# Altium PCB Test_Monitor_PCB1.PcbDoc (part 1 of 3)
Units mm, origin at the board's own origin, x right, y up, seen from the top; angles counter-clockwise.
Board outline 100 x 83 mm, 4 copper layers (Top Layer, GND1, GND2, Bottom Layer), stack 1.57 mm thick; 215 components, 124 nets, 896 pads, 300 vias.
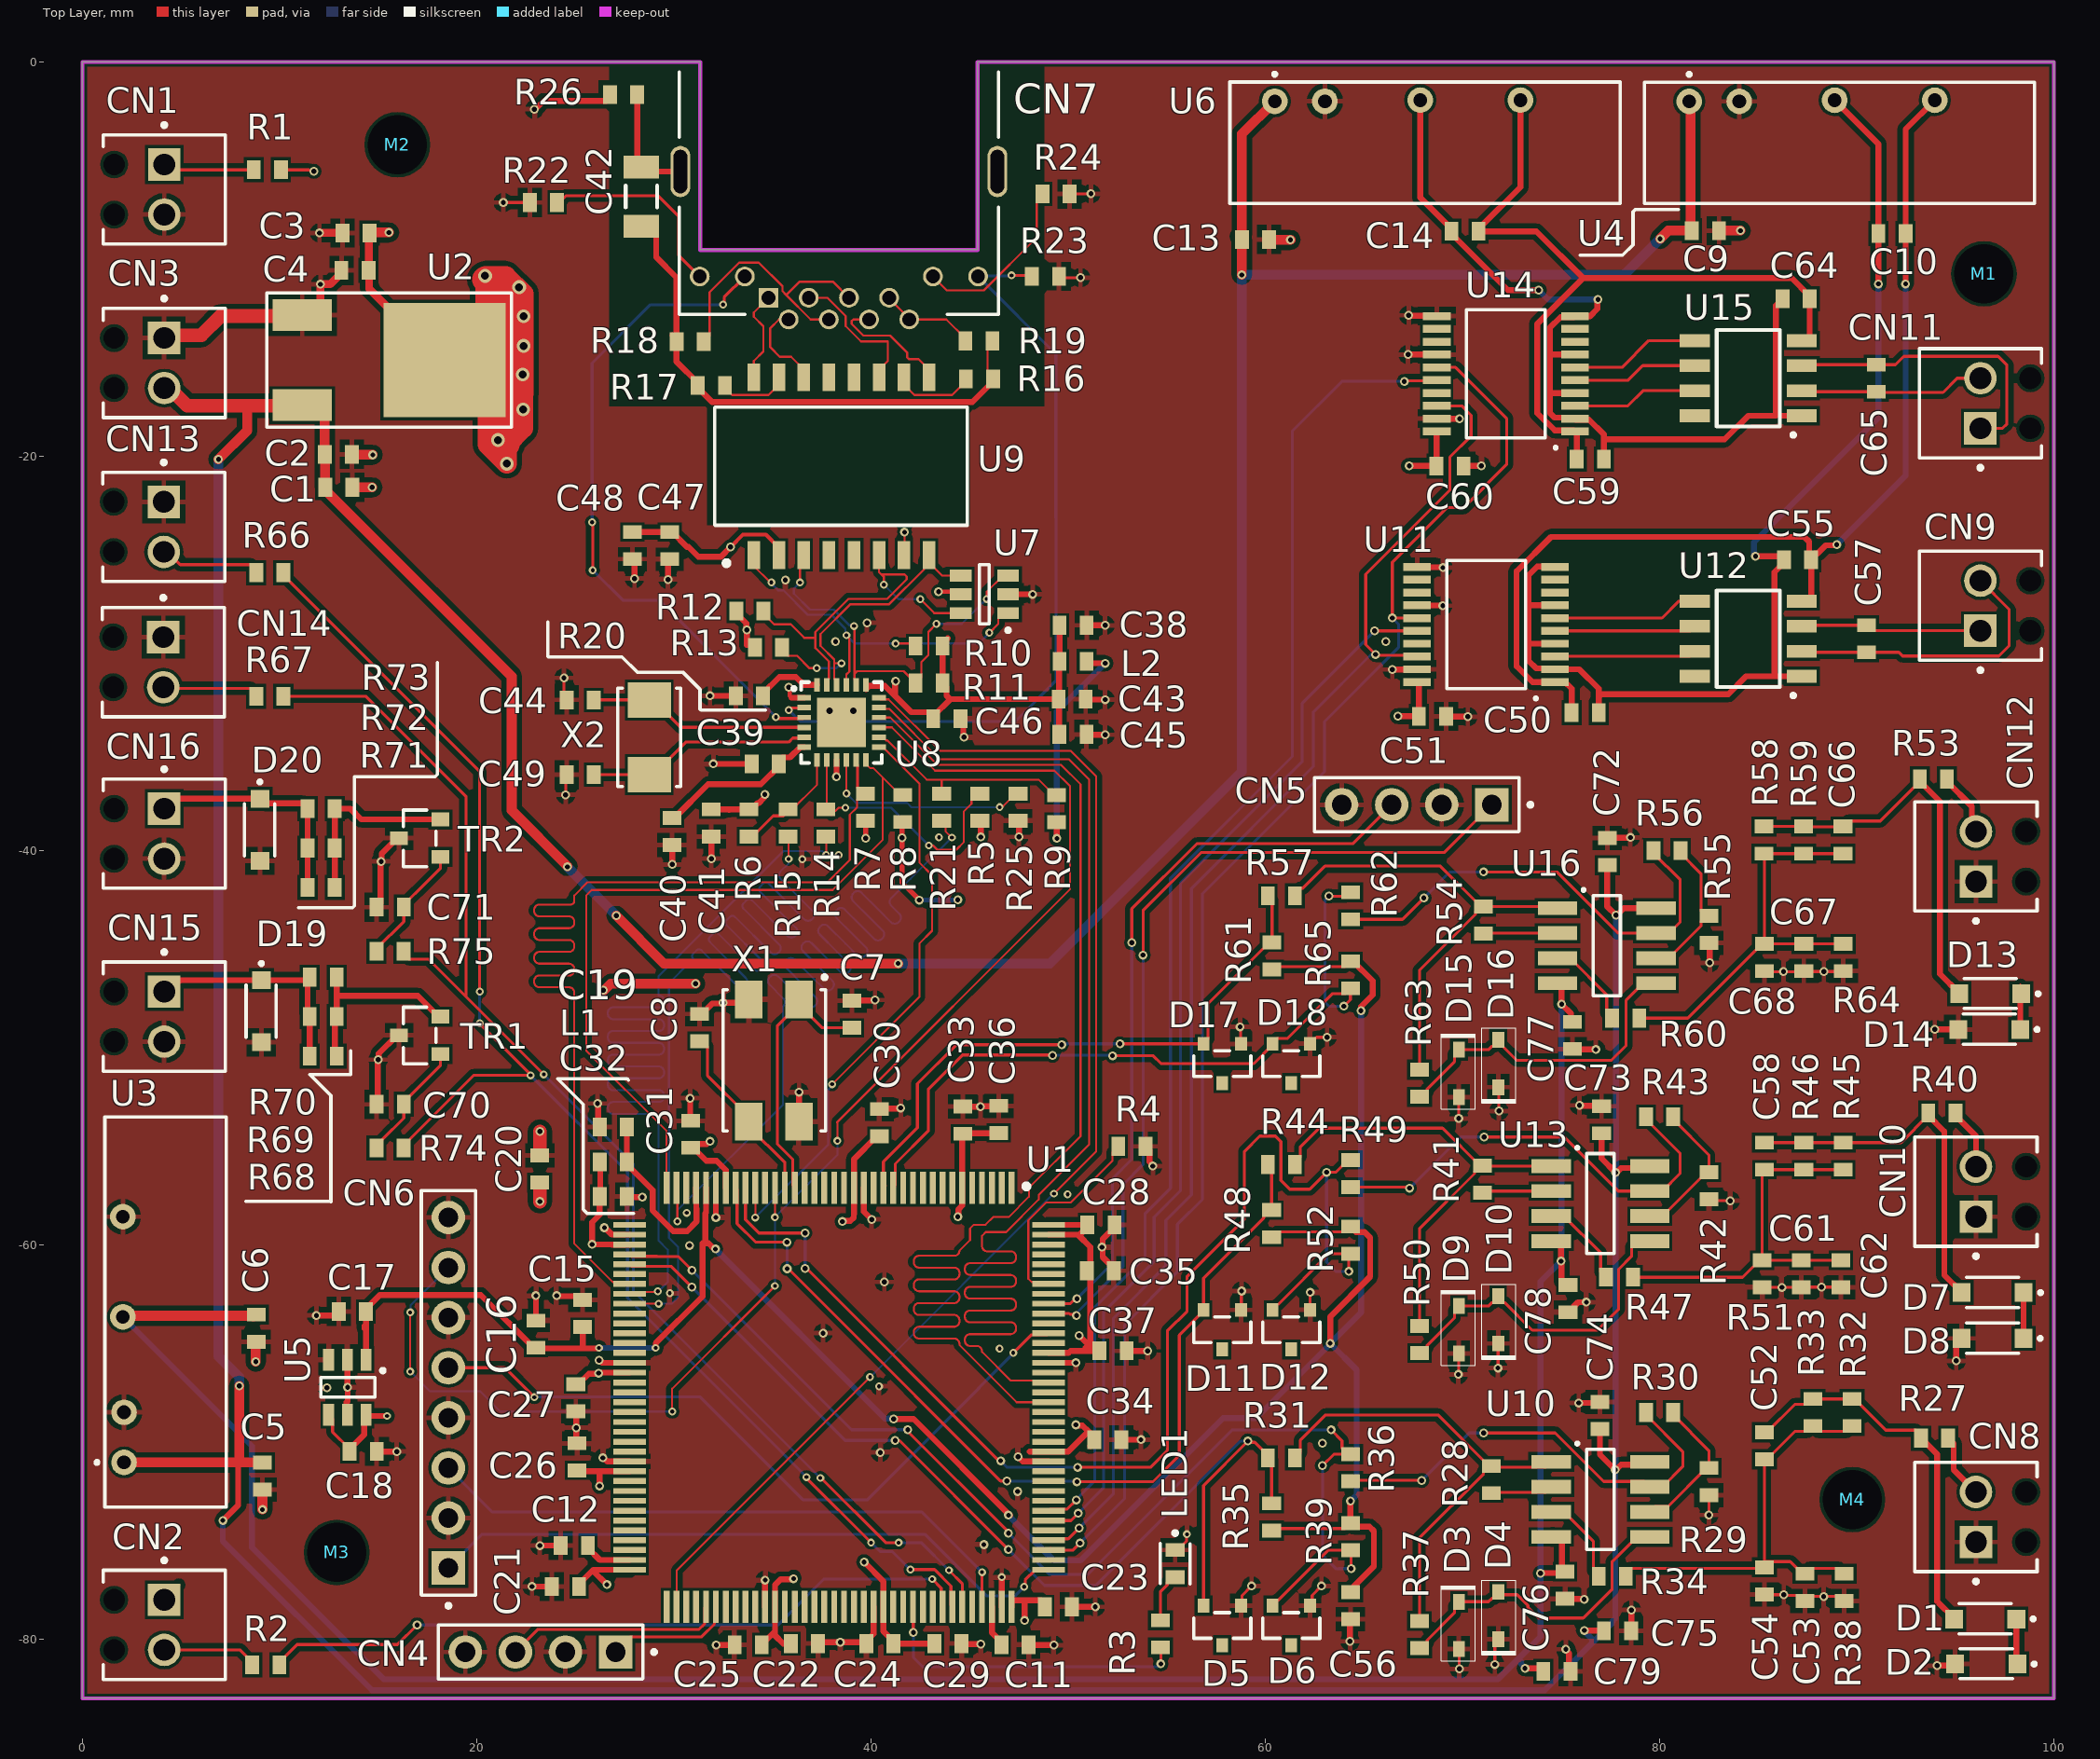
[diagram p0: Top Layer view]
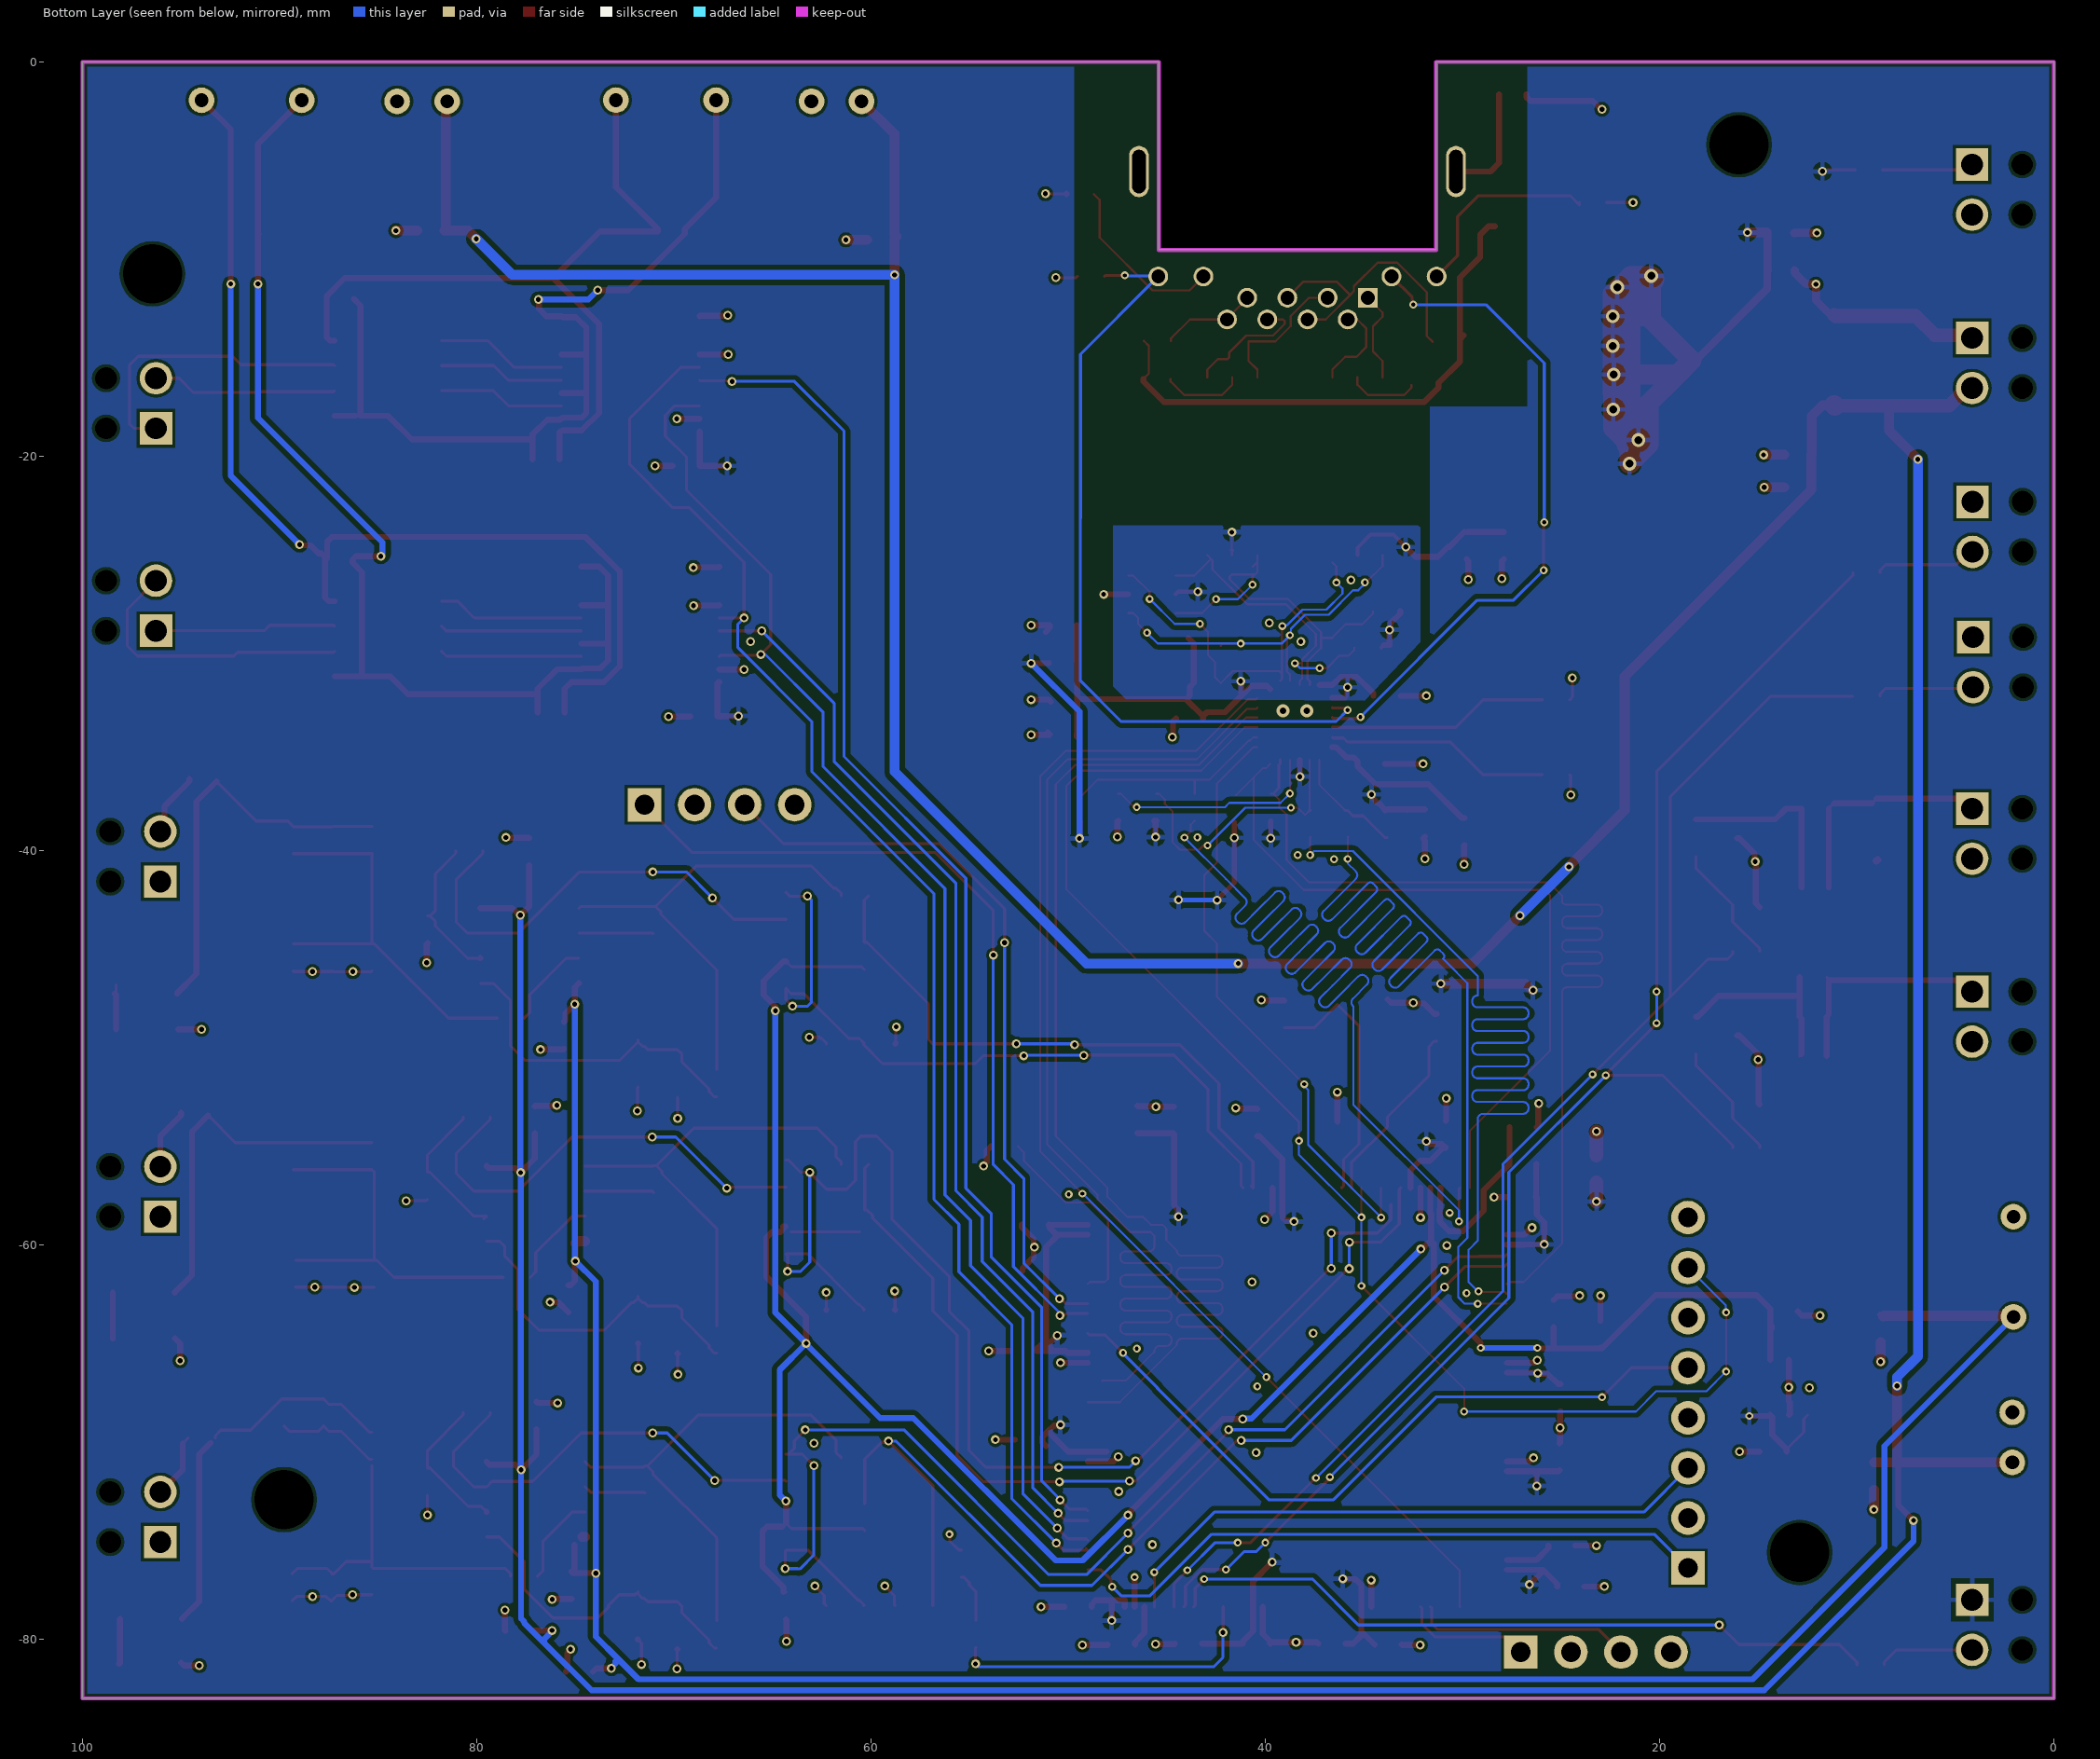
[diagram p1: Bottom Layer view, seen from below]
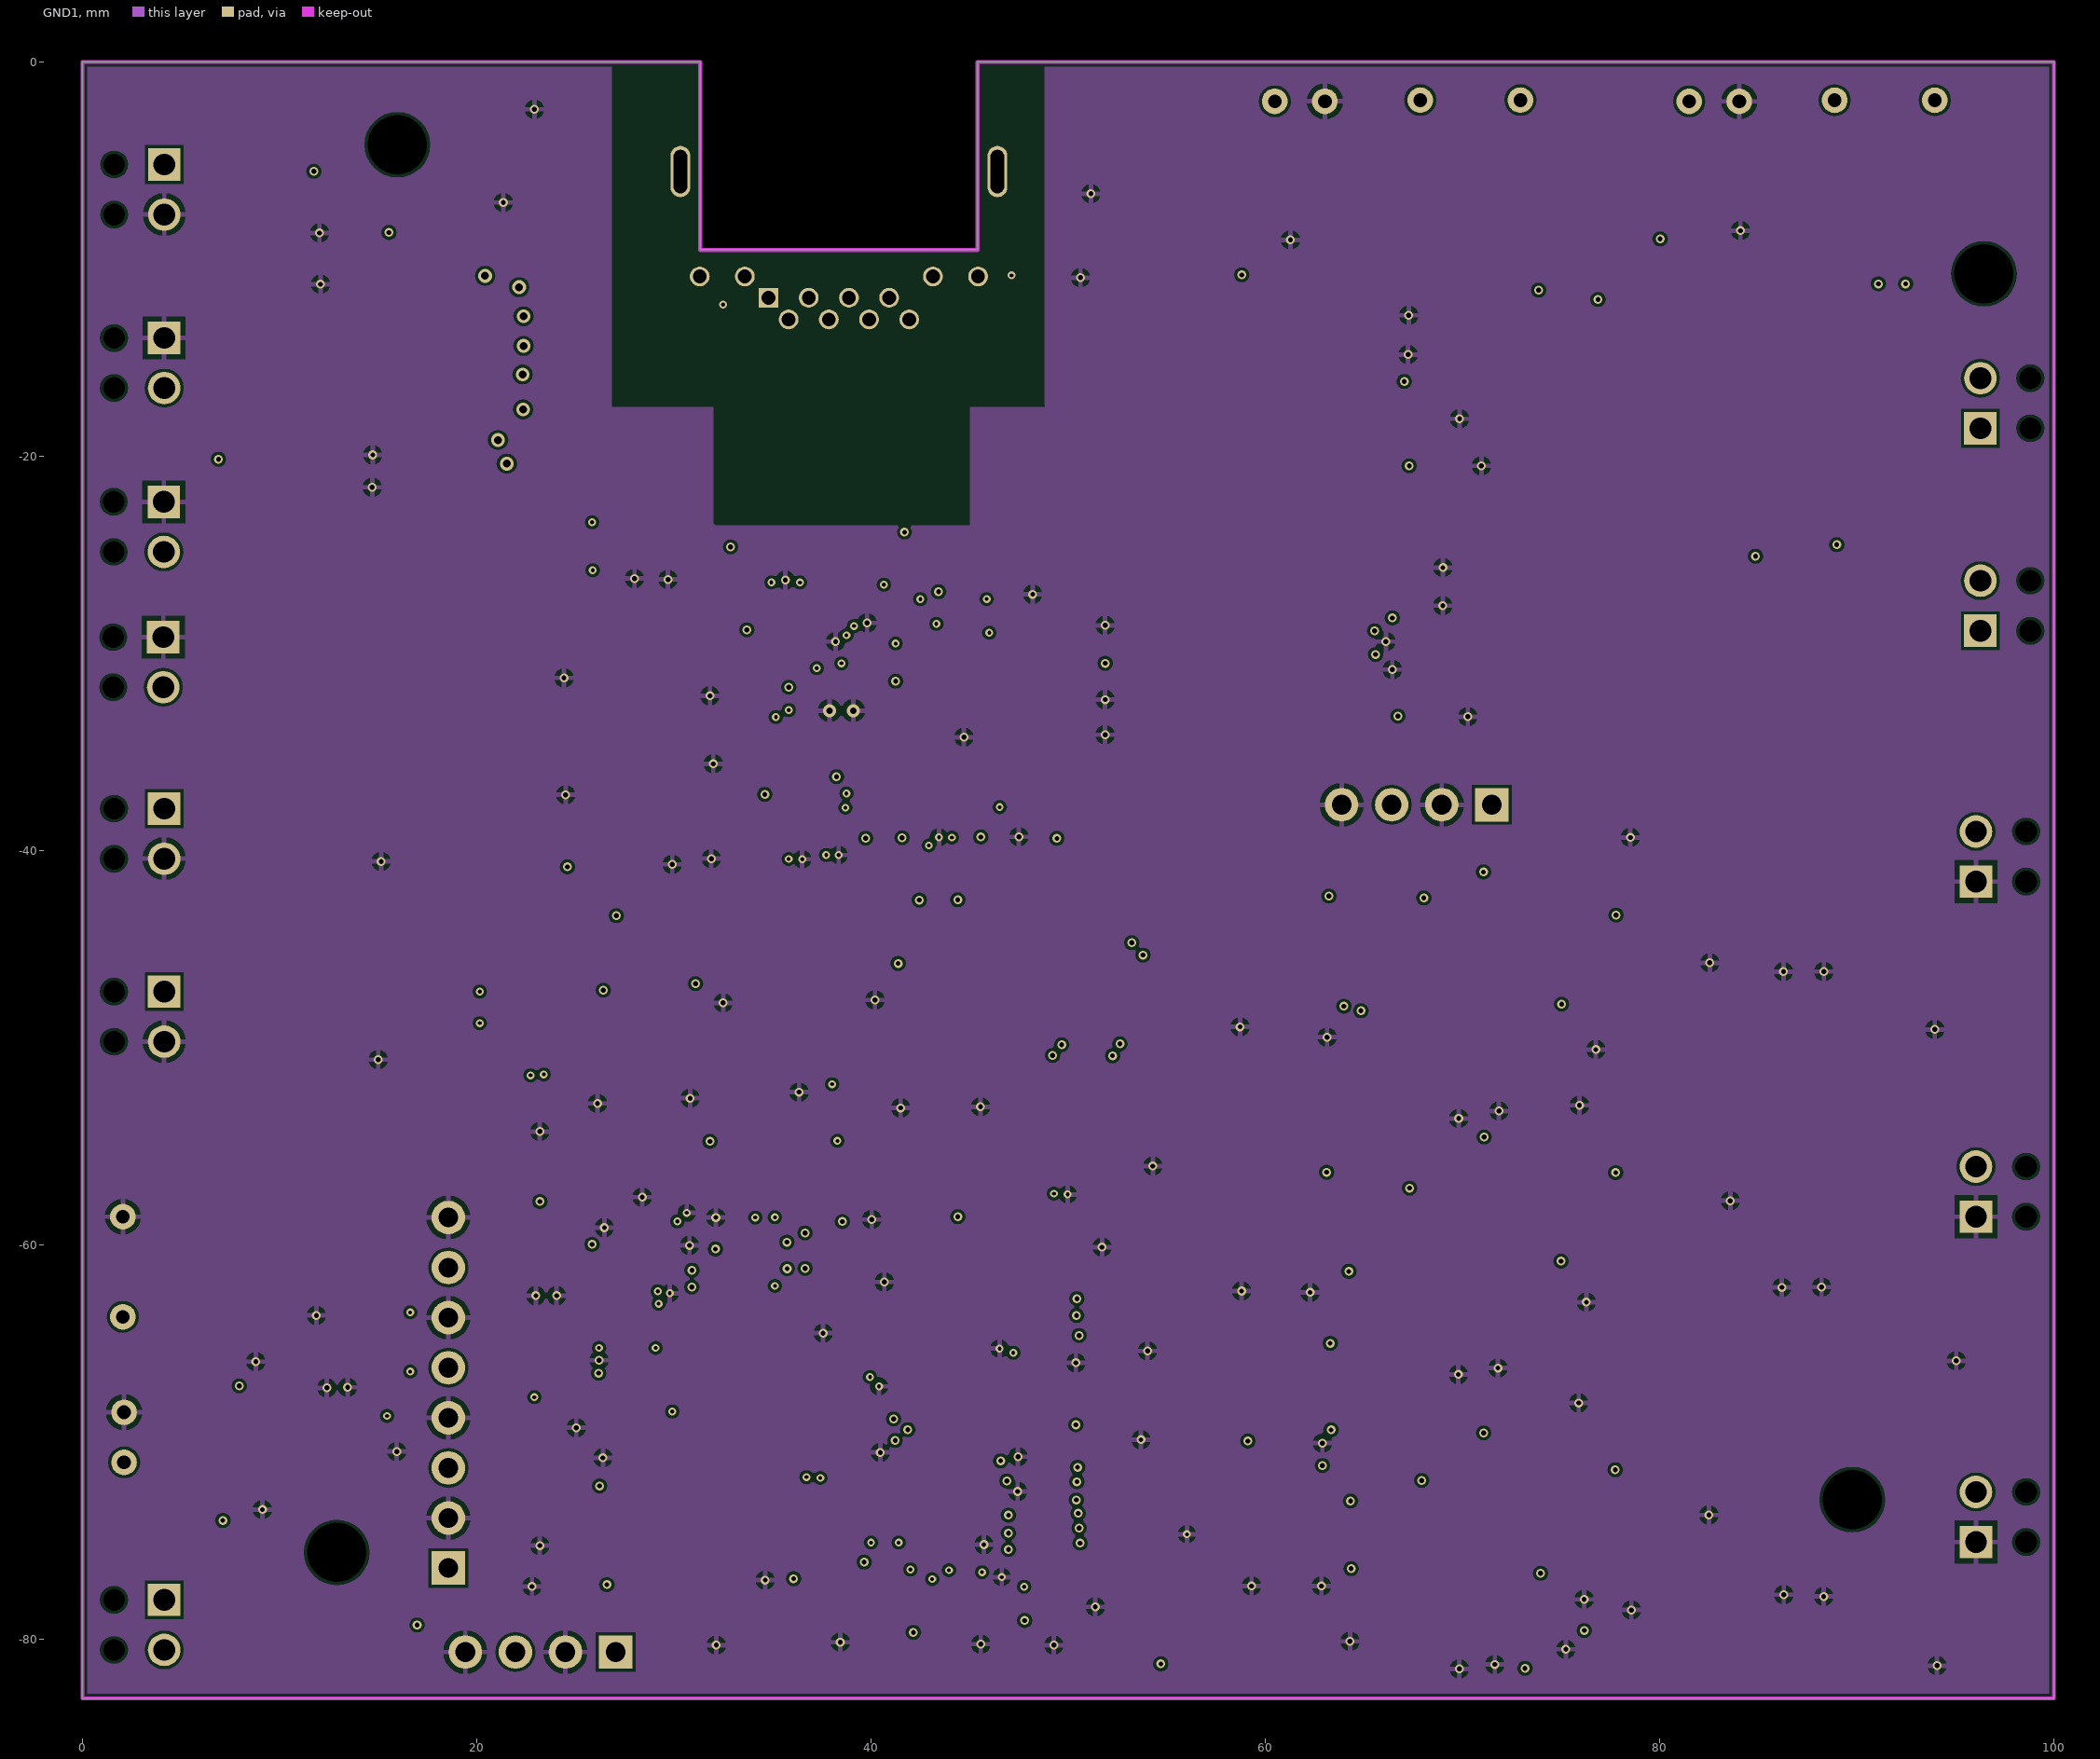
[diagram p2: GND1]
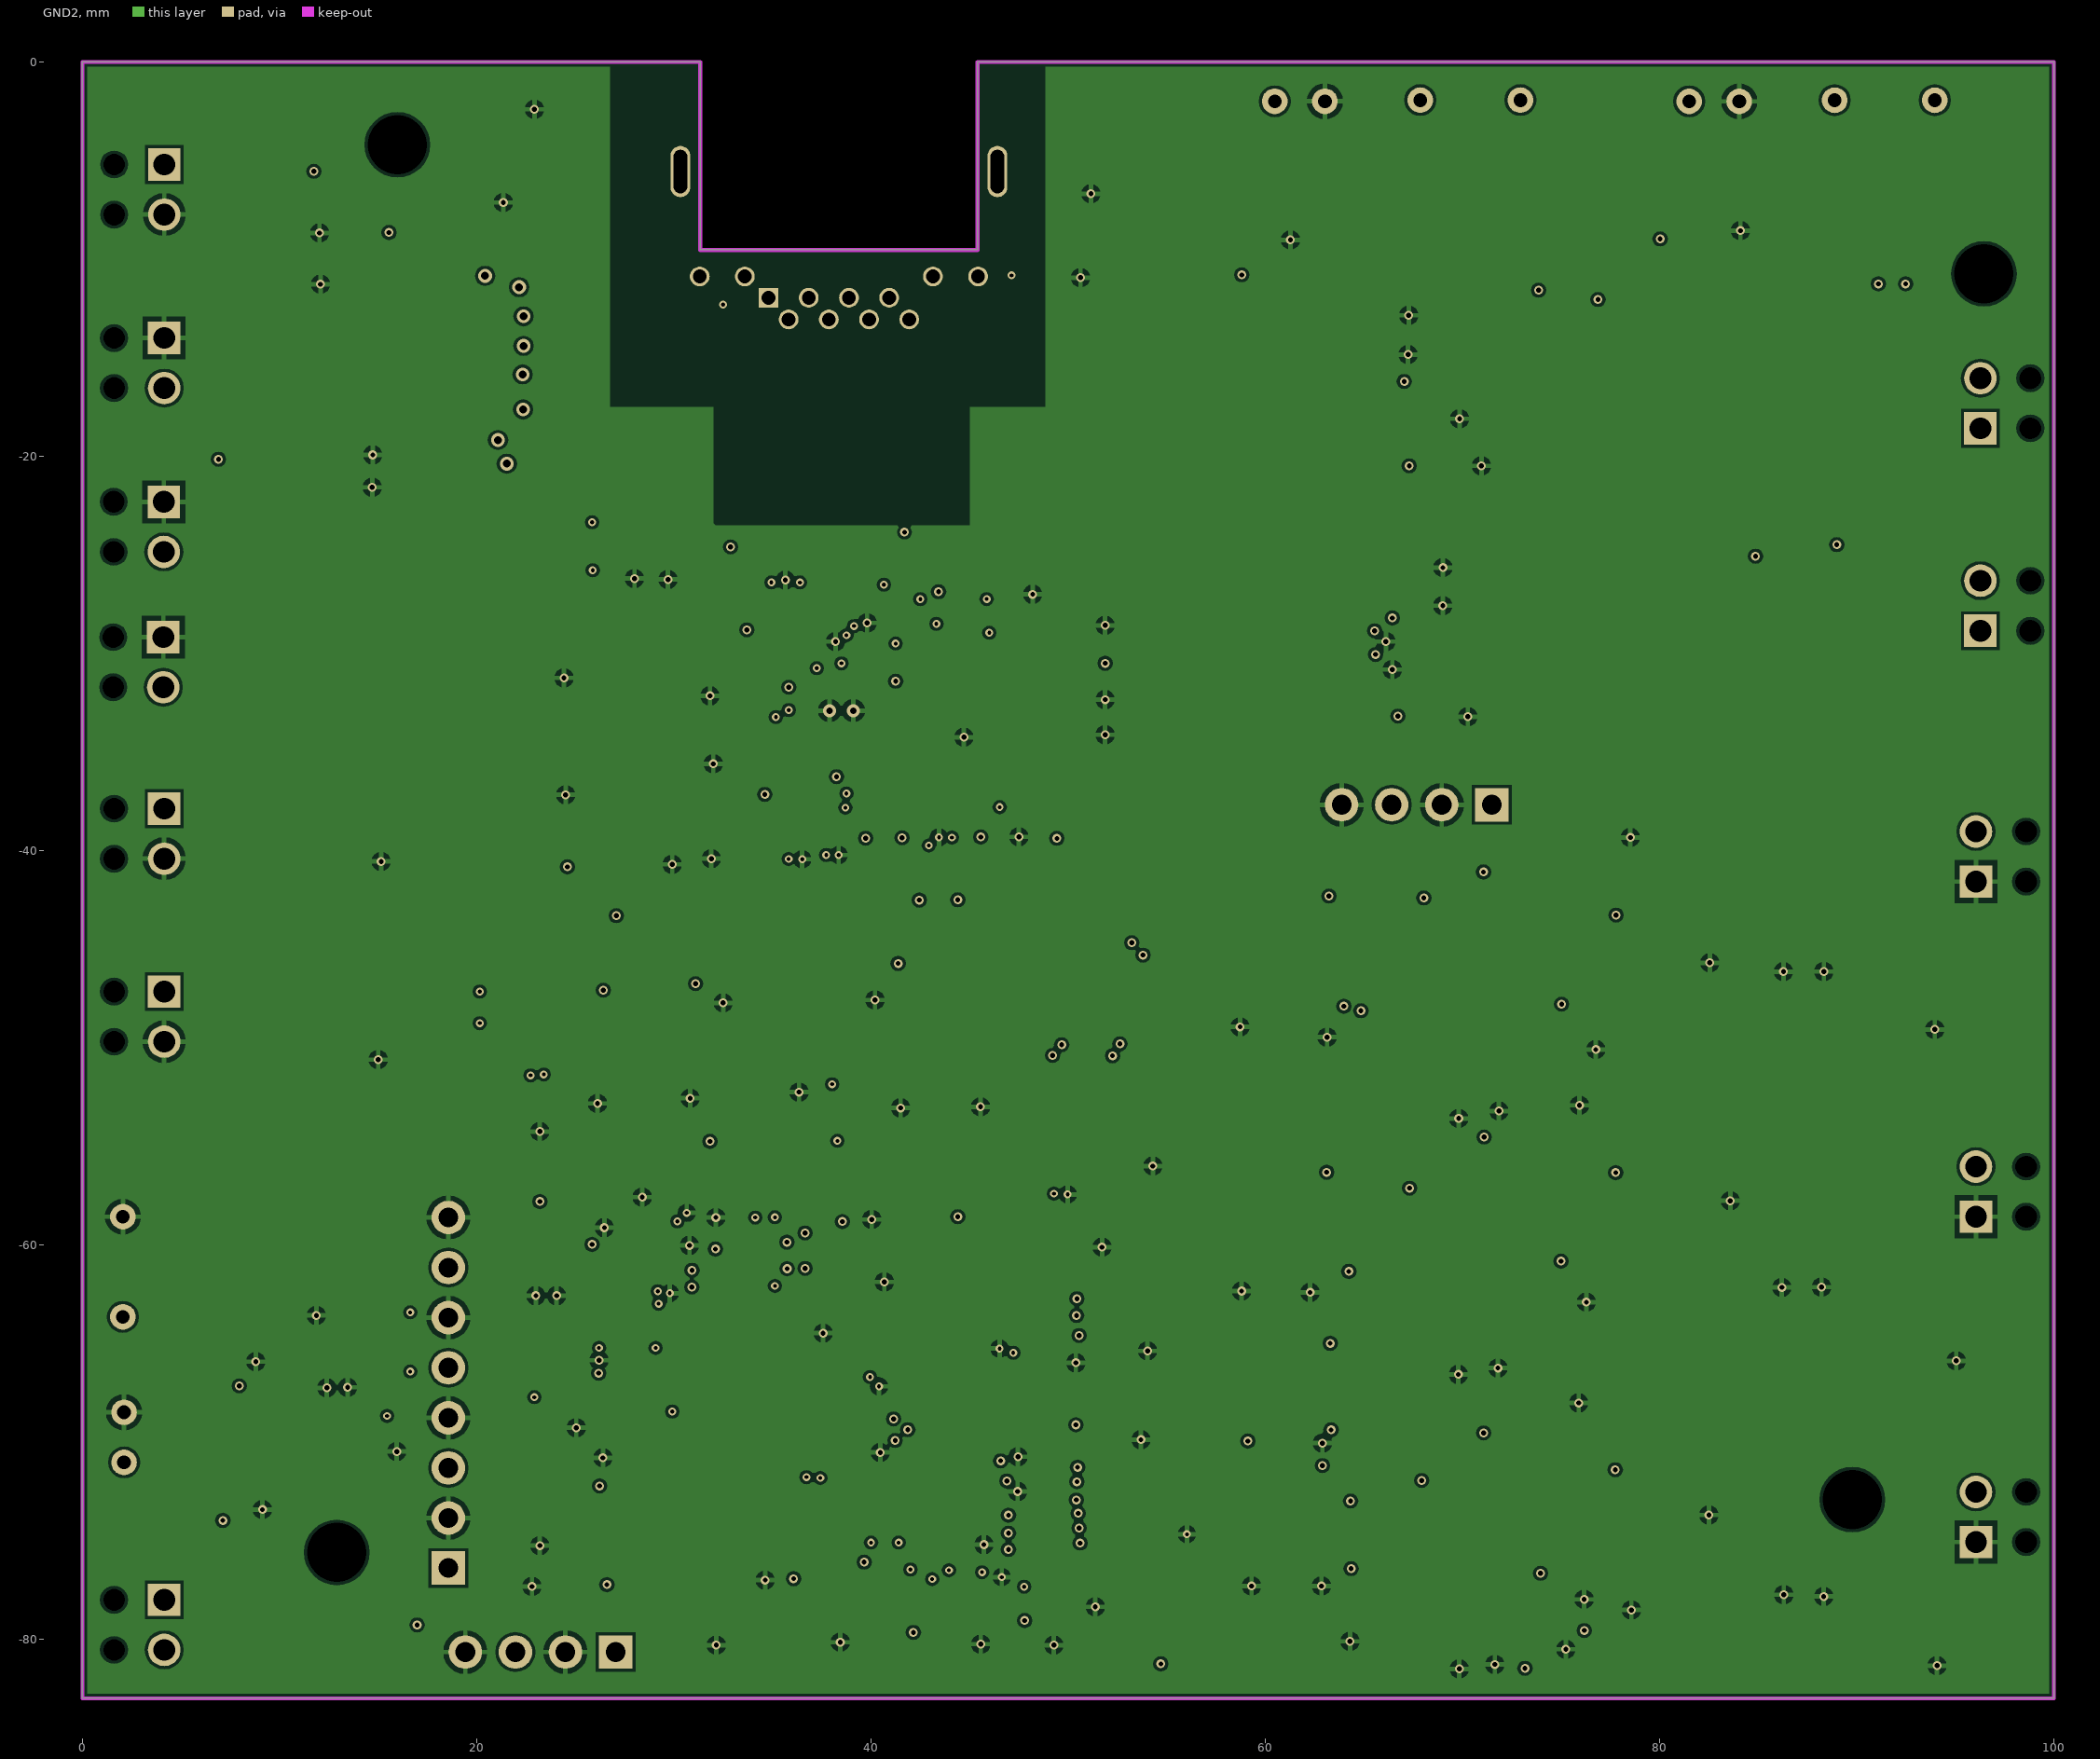
[diagram p3: GND2]

## Layer stack, top to bottom
Top Solder: solder mask 0.0102, Solder Resist, Dk 3.8
Top Layer: signal copper 0.035
Dielectric 2: prepreg 0.1, PP-006, Dk 4.05
GND1: signal copper 0.0175
Dielectric 1: dielectric 1.265, FR-4, Dk 4.6
GND2: signal copper 0.0175
Dielectric 3: prepreg 0.1, PP-006, Dk 4.05
Bottom Layer: signal copper 0.035
Bottom Solder: solder mask 0.0102, Solder Resist, Dk 3.8

## Board outline
0,0 0,-83 100,-83 100,0 45.4,0 45.4,-9.52 31.34,-9.52 31.34,0

## Design rules (kind name [scope] priority, off if disabled: settings)
Clearance "Clearance polygon to track" [(IsTrack)and (OnBottomLayer or OnTopLayer) vs InPolygon] p1: gap=0.25 ignorepadtopadclearanceinfootprint=FALSE
Clearance [All] p2: gap=0.15 ignorepadtopadclearanceinfootprint=FALSE
DiffPairsRouting [All] p1: maxlimit=0.3 minlimit=0.05 mostfreqgap=0.152 toplayer_minwidth=0.1 toplayer_maxwidth=0.4 toplayer_prefwidth=0.11 midlayer1_minwidth=0.1 midlayer1_maxwidth=0.4 midlayer1_prefwidth=0.11 midlayer2_minwidth=0.1 midlayer2_maxwidth=0.4 midlayer2_prefwidth=0.11 bottomlayer_minwidth=0.1 bottomlayer_maxwidth=0.4 bottomlayer_prefwidth=0.11 maxuncoupledlength=12.7
MatchedLengths "Schematic Matched Net Lengths_11" [InNet('TXC_N')] p1: tolerance=1 checknetsindiffpair=TRUE checkdiffpairvsdiffpair=FALSE checkxsignals=FALSE checkothers=FALSE
MatchedLengths "Schematic Matched Net Lengths_10" [InNet('TXC_P')] p2: tolerance=1 checknetsindiffpair=TRUE checkdiffpairvsdiffpair=FALSE checkxsignals=FALSE checkothers=FALSE
MatchedLengths "Schematic Matched Net Lengths_9" [InNet('RXC_N')] p3: tolerance=1 checknetsindiffpair=TRUE checkdiffpairvsdiffpair=FALSE checkxsignals=FALSE checkothers=FALSE
MatchedLengths "Schematic Matched Net Lengths_8" [InNet('RXC_P')] p4: tolerance=1 checknetsindiffpair=TRUE checkdiffpairvsdiffpair=FALSE checkxsignals=FALSE checkothers=FALSE
MatchedLengths "Schematic Matched Net Lengths_3" [InNet('RX_N')] p5: tolerance=1 checknetsindiffpair=TRUE checkdiffpairvsdiffpair=FALSE checkxsignals=FALSE checkothers=FALSE
MatchedLengths "Schematic Matched Net Lengths_2" [InNet('TX_N')] p6: tolerance=1 checknetsindiffpair=TRUE checkdiffpairvsdiffpair=FALSE checkxsignals=FALSE checkothers=FALSE
MatchedLengths "Schematic Matched Net Lengths_1" [InNet('TX_P')] p7: tolerance=1 checknetsindiffpair=TRUE checkdiffpairvsdiffpair=FALSE checkxsignals=FALSE checkothers=FALSE
MatchedLengths "Schematic Matched Net Lengths" [InNet('RX_P')] p8: tolerance=1 checknetsindiffpair=TRUE checkdiffpairvsdiffpair=FALSE checkxsignals=FALSE checkothers=FALSE
MinimumSolderMaskSliver [All] p1: minsoldermaskwidth=0.1
PolygonConnect [All] p1: connectstyle=Relief reliefconductorwidth=0.254 reliefentries=4 polygonreliefangle="90 Angle" airgapwidth=0.254
RoutingVias [All] p1: holewidth=0.25 width=0.45 viastyle="Through Hole" minholewidth=0.2 minwidth=0.4 maxholewidth=0.711 maxwidth=1.27
SilkToSilkClearance [All] p1: silktosilkclearance=0.15
SilkToSolderMaskClearance [IsPad] p1: minsilkscreentomaskgap=0.15 clearancetoexposedcopper=TRUE
SolderMaskExpansion [All] p1: expansion=0.05
Width [All] p1: maxlimit=2 minlimit=0.1 preferedwidth=0.15
26 further rules are at their usual default settings.

## Classes and differential pairs
component class MCU_Sheet1: C1 C2 C3 C4 C5 C6 C7 C8 C9 C10 C11 C12 C13 C14 C15 C18 C19 C20 C21 C22 C23 C24 C25 C26 C27 C28 C29 C30 C31 C32 C33 C34 C35 C36 C37 CN1 CN2 CN3 CN4 CN5 CN6 L1 LED1 M1 M2 M3 M4 R1 R2 R3 R4 U1 U2 U3 U4 U5 U6 X1
component class Input_Stage: C16 C17 C50 C51 C52 C53 C54 C55 C56 C57 C58 C59 C60 C61 C62 C64 C65 C66 C67 C68 C70 C71 C72 C73 C74 C75 C76 C77 C78 C79 CN8 CN9 CN10 CN11 CN12 CN13 CN14 CN15 CN16 CN*1 D1 D2 D3 D4 D5 D6 D7 D8 D9 D10 D11 D12 D13 D14 D15 D16 D17 D18 D19 D20 Q1 Q2 R27 R28 R29 R30 R31 R32 R33 R34 R35 R36 R37 R38 R39 R40 R41 R42 R43 R44 R45 R46 R47 R48 R49 R50 R51 R52 R53 R54 R55 R56 R57 R58 R59 R60 R61 R62 R63 R64 R65 R66 R67 R68 R69 R70 R71 R72 R73 R74 R75 TR1 TR2 U10 U11 U12 U13 U14 U15 U16
component class Ethernet_Sheet2: C38 C39 C40 C41 C42 C43 C44 C45 C46 C47 C48 C49 CN7 L2 R5 R6 R7 R8 R9 R10 R11 R12 R13 R14 R15 R16 R17 R18 R19 R20 R21 R22 R23 R24 R25 R26 U7 U8 U9 X2
differential pair TXC: +TXC_P -TXC_N
differential pair RXC: +RXC_P -RXC_N
differential pair TX: +TX_P -TX_N
differential pair RX: +RX_P -RX_N

## Components (designator, comment, footprint, x,y, rotation, side; value= is the part's Value field where it differs from the comment)
C1 "4.7uF" Cap_0603 13,-21.575 r180 top
C2 "4.7uF" Cap_0603 12.975,-19.9 r180 top
C3 "4.7uF" Cap_0603 13.875,-8.675 r0 top
C4 "4.7uF" Cap_0603 13.825,-10.575 r0 top
C5 "4.7uF" Cap_0603 9.128,-71.725 r90 top
C6 "4.7uF" Cap_0603 8.815,-64.223 r90 top
C7 "30pF" Cap_0603 39.037,-48.3 r270 top
C8 "30pF" Cap_0603 31.3,-48.975 r270 top
C9 "4.7uF" Cap_0603 82.325,-8.556 r180 top
C10 "4.7uF" Cap_0603 91.79,-8.695 r0 top
C11 "2.2uF" Cap_0603 47.3,-80.275 r0 top
C12 "2.2uF" Cap_0603 24.95,-75.25 r180 top
C13 "4.7uF" Cap_0603 59.5,-9 r180 top
C14 "4.7uF" Cap_0603 70.13,-8.59 r0 top
C15 "82pF" Cap_0603 25.375,-63.48 r270 top
C16 "82pF" Cap_0603 23,-64.525 r270 top
C17 "82pF" Cap_0603 13.686,-63.373 r0 top
C18 "100nF" Cap_0603 14.242,-70.478 r180 top
C19 "100nF" Cap_0603 26.925,-54.025 r0 top
C20 "4.7uF" Cap_0603 23.2,-56.15 r270 top
C21 "100nF" Cap_0603 24.5,-77.325 r0 top
C22 "100nF" Cap_0603 36.62,-80.225 r180 top
C23 "100nF" Cap_0603 49.5,-78.355 r180 top
C24 "100nF" Cap_0603 40.445,-80.225 r0 top
C25 "100nF" Cap_0603 33.77,-80.275 r0 top
C26 "100nF" Cap_0603 25.075,-70.75 r270 top
C27 "100nF" Cap_0603 25.025,-67.75 r90 top
C28 "100nF" Cap_0603 51.662,-58.977 r180 top
C29 "100nF" Cap_0603 43.9,-80.225 r180 top
C30 "100nF" Cap_0603 40.42,-53.8 r270 top
C31 "100nF" Cap_0603 30.85,-54.387 r270 top
C32 "100nF" Cap_0603 26.925,-57.55 r180 top
C33 "100nF" Cap_0603 44.65,-53.67 r270 top
C34 "100nF" Cap_0603 52.005,-69.88 r180 top
C35 "100nF" Cap_0603 51.63,-61.31 r180 top
C36 "100nF" Cap_0603 46.485,-53.635 r270 top
C37 "100nF" Cap_0603 52.275,-65.375 r180 top
C38 "100nF" Cap_0603 50.25,-28.57 r180 top
C39 "470pF" Cap_0603 34.63,-35.6 r0 top
C40 "1uF" Cap_0603 29.9,-39.03 r90 top
C41 "100nF" Cap_0603 31.9,-38.6 r90 top
C42 "1nF 2kV TC1206KKX7RDBB102" CAP_1206 28.35,-6.827 r270 top value=100nF
C43 "10uF" Cap_0603 50.2,-32.32 r180 top
C44 "30pF" Cap_0603 25.248,-32.355 r0 top
C45 "100nF" Cap_0603 50.245,-34.1 r180 top
C46 "100nF" Cap_0603 43.845,-33.305 r180 top
C47 "100nF" Cap_0603 29.79,-24.529 r90 top
C48 "100nF" Cap_0603 27.895,-24.529 r90 top
C49 "30pF" Cap_0603 25.248,-36.155 r0 top
C50 "100nF" Cap_0603 76.225,-33.005 r180 top
C51 "100nF" Cap_0603 68.48,-33.195 r180 top
C52 "10pF" Cap_0603 85.318,-70.187 r90 top
C53 "82pF" Cap_0603 87.368,-77.367 r90 top
C54 "6pF" Cap_0603 85.318,-77.042 r90 top
C55 "100nF" Cap_0603 87,-25.255 r180 top
C56 "82pF" Cap_0603 64.317,-78.3 r90 top
C57 "10nF" Cap_0603 90.5,-29.255 r270 top
C58 "10pF" Cap_0603 85.318,-55.495 r90 top
C59 "100nF" Cap_0603 76.485,-20.15 r180 top
C60 "100nF" Cap_0603 69.37,-20.49 r180 top
C61 "82pF" Cap_0603 87.192,-61.465 r90 top
C62 "6pF" Cap_0603 89.192,-61.465 r90 top
C64 "100nF" Cap_0603 86.925,-12.01 r180 top
C65 "10nF" Cap_0603 91,-16.04 r270 top
C66 "10pF" Cap_0603 89.302,-39.465 r90 top
C67 "82pF" Cap_0603 87.318,-45.42 r90 top
C68 "6pF" Cap_0603 85.318,-45.42 r90 top
C70 "10nF" Cap_0603 15.61,-52.87 r180 top
C71 "10nF" Cap_0603 15.61,-42.87 r180 top
C72 "10nF" Cap_0603 77.345,-40.05 r270 top
C73 "10nF" Cap_0603 77.055,-53.655 r270 top
C74 "10nF" Cap_0603 76.97,-68.65 r270 top
C75 "1uF" Cap_0603 77.865,-79.57 r180 top
C76 "10nF" Cap_0603 75.195,-77.26 r90 top
C77 "10nF" Cap_0603 75.575,-49.375 r90 top
C78 "10nF" Cap_0603 75.355,-62.725 r90 top
C79 "1uF" Cap_0603 74.79,-81.635 r180 top
CN1 "Connector 0.5/2-2.54" "Connector 0.5/2-2.54" 2.88,-6.47 r270 top
CN2 "Connector 0.5/2-2.54" "Connector 0.5/2-2.54" 2.874,-79.27 r270 top
CN3 "Connector 0.5/2-2.54" "Connector 0.5/2-2.54" 2.874,-15.27 r270 top
CN4 "Header 2.54mm" "header 2.54mm 4way" 19.42,-80.65 r270 top
CN5 "Header 2.54mm" "header 2.54mm 4way" 63.87,-37.675 r270 top
CN6 "Header 2.54mm" "header 2.54mm 8way" 18.561,-67.5 r180 top
CN7 "KRJ-CB4.2GYZNL" RJ45_KRJ-CB4.2GYZNL 38.37,-9.31 r180 top
CN8 "Connector 0.5/2-2.54" "Connector 0.5/2-2.54" 97.317,-73.8 r90 top
CN9 "Connector 0.5/2-2.54" "Connector 0.5/2-2.54" 97.54,-27.58 r90 top
CN10 "Connector 0.5/2-2.54" "Connector 0.5/2-2.54" 97.317,-57.3 r90 top
CN11 "Connector 0.5/2-2.54" "Connector 0.5/2-2.54" 97.54,-17.31 r90 top
CN12 "Connector 0.5/2-2.54" "Connector 0.5/2-2.54" 97.317,-40.3 r90 top
CN13 "Connector 0.5/2-2.54" "Connector 0.5/2-2.54" 2.855,-23.58 r270 top
CN14 "Connector 0.5/2-2.54" "Connector 0.5/2-2.54" 2.83,-30.445 r270 top
CN15 "Connector 0.5/2-2.54" "Connector 0.5/2-2.54" 2.874,-48.42 r270 top
CN16 "Connector 0.5/2-2.54" "Connector 0.5/2-2.54" 2.874,-39.14 r270 top
D1 "BZT52C30" "SOD123 BZT52C30" 94.945,-78.975 r0 top
D2 "BZT52C30" "SOD123 BZT52C30" 94.995,-81.255 r0 top
D3 "1N4148WS-HG3-08" "SOD-323 diode 1N4148WS-HG3-08" 69.818,-79.3 r90 top
D4 "1N4148WS-HG3-08" "SOD-323 diode 1N4148WS-HG3-08" 71.817,-78.8 r270 top
D5 "BAT721" "SOT23 BAT721" 57.817,-79.3 r0 top
D6 "BAT721" "SOT23 BAT721" 61.317,-79.3 r0 top
D7 "BZT52C30" "SOD123 BZT52C30" 95.318,-62.42 r0 top
D8 "BZT52C30" "SOD123 BZT52C30" 95.31,-64.74 r0 top
D9 "1N4148WS-HG3-08" "SOD-323 diode 1N4148WS-HG3-08" 69.818,-64.3 r90 top
D10 "1N4148WS-HG3-08" "SOD-323 diode 1N4148WS-HG3-08" 71.817,-63.8 r270 top
D11 "BAT721" "SOT23 BAT721" 57.817,-64.3 r0 top
D12 "BAT721" "SOT23 BAT721" 61.317,-64.3 r0 top
D13 "BZT52C30" "SOD123 BZT52C30" 95.2,-47.26 r0 top
D14 "BZT52C30" "SOD123 BZT52C30" 95.145,-49.07 r0 top
D15 "1N4148WS-HG3-08" "SOD-323 diode 1N4148WS-HG3-08" 69.818,-51.3 r90 top
D16 "1N4148WS-HG3-08" "SOD-323 diode 1N4148WS-HG3-08" 71.817,-50.8 r270 top
D17 "BAT721" "SOT23 BAT721" 57.817,-50.8 r0 top
D18 "BAT721" "SOT23 BAT721" 61.317,-50.8 r0 top
D19 "BZT52C30" "SOD123 BZT52C30" 9.075,-49.725 r90 top
D20 "BZT52C30" "SOD123 BZT52C30" 9,-40.52 r90 top
L1 "BEAD" Cap_0603 26.925,-55.788 r0 top value=100uH
L2 "BEAD" Cap_0603 50.25,-30.411 r0 top value=100uH
LED1 "LED" "LED 0603" 5.4,75.337 r90 top
M1 "Mounting hole 3mm" Mounting_Hole_3mm 96.45,-10.75 r0 top
M2 "Mounting hole 3mm" Mounting_Hole_3mm 15.975,-4.2 r0 top
M3 "Mounting hole 3mm" Mounting_Hole_3mm 12.9,-75.6 r0 top
M4 "Mounting hole 3mm" Mounting_Hole_3mm 89.775,-72.925 r0 top
R1 "1k" Res_0603 9.38,-5.47 r180 top value=12K1
R2 "1k" Res_0603 9.3,-81.3 r180 top value=12K1
R3 "1k" Res_0603 54.675,-79.728 r90 top value=12K1
R4 "10k" Res_0603 53.23,-55 r180 top value=12K1
R5 "10k" Res_0603 45.52,-37.8 r270 top value=12K1
R6 "10k" Res_0603 33.8,-38.6 r90 top value=12K1
R7 "10k" Res_0603 39.722,-37.8 r270 top value=12K1
R8 "1k5" Res_0603 41.602,-37.862 r90 top value=12K1
R9 "10k" Res_0603 49.4,-37.87 r270 top value=12K1
R10 "50" Res_0603 42.945,-29.614 r0 top value=12K1
R11 "50" Res_0603 42.945,-31.5 r0 top value=12K1
R12 "50" Res_0603 33.85,-27.85 r180 top value=12K1
R13 "50" Res_0603 34.8,-29.7 r180 top value=12K1
R14 "33" Res_0603 37.7,-38.6 r90 top value=12K1
R15 "33" Res_0603 35.8,-38.6 r90 top value=12K1
R16 "75" Res_0603 45.5,-16.075 r180 top value=12K1
R17 "75" Res_0603 31.9,-16.4 r0 top value=12K1
R18 "75" Res_0603 30.825,-14.19 r0 top value=12K1
R19 "75" Res_0603 45.475,-14.15 r180 top value=12K1
R20 "12k1" Res_0603 33.83,-32.15 r0 top value=12K1
R21 "33" Res_0603 43.58,-37.8 r90 top value=12K1
R22 "270" Res_0603 23.383,-7.127 r0 top value=12K1
R23 "10k" Res_0603 48.85,-10.875 r180 top value=12K1
R24 "270" Res_0603 49.388,-6.7 r180 top value=12K1
R25 "10k" Res_0603 47.46,-37.8 r270 top value=12K1
R26 "0" Res_0603 27.451,-1.65 r0 top value=12K1
R27 "100" Res_0603 93.95,-69.8 r180 top value=12K1
R28 "100" Res_0603 71.47,-71.9 r90 top value=12K1
R29 "29.4" Res_0603 82.5,-72 r90 top value=12K1
R30 "560" Res_0603 80,-68.5 r180 top value=12K1
R31 "1k" Res_0603 60.818,-70.8 r180 top value=12K1
R32 "1.8M" Res_0603 89.768,-68.5 r90 top value=12K1
R33 "1.8M" Res_0603 87.768,-68.5 r90 top value=12K1
R34 "100" Res_0603 77.6,-76.8 r180 top value=12K1
R35 "1k" Res_0603 60.317,-73.8 r270 top value=12K1
R36 "1k" Res_0603 64.317,-71.3 r90 top value=12K1
R37 "1k" Res_0603 67.817,-79.76 r90 top value=12K1
R38 "100k" Res_0603 89.368,-77.367 r90 top value=12K1
R39 "1k" Res_0603 64.317,-74.8 r90 top value=12K1
R40 "100" Res_0603 94.317,-53.3 r180 top value=12K1
R41 "100" Res_0603 71.015,-56.67 r90 top value=12K1
R42 "29.4" Res_0603 82.5,-57 r90 top value=12K1
R43 "560" Res_0603 80,-53.5 r180 top value=12K1
R44 "1k" Res_0603 60.818,-55.92 r180 top value=12K1
R45 "1.8M" Res_0603 89.317,-55.495 r90 top value=12K1
R46 "1.8M" Res_0603 87.318,-55.495 r90 top value=12K1
R47 "100" Res_0603 77.97,-61.64 r180 top value=12K1
R48 "1k" Res_0603 60.317,-58.92 r270 top value=12K1
R49 "1k" Res_0603 64.317,-56.38 r90 top value=12K1
R50 "1k" Res_0603 67.817,-64.8 r90 top value=12K1
R51 "100k" Res_0603 85.192,-61.465 r90 top value=12K1
R52 "1k" Res_0603 64.33,-59.755 r90 top value=12K1
R53 "100" Res_0603 93.89,-36.37 r180 top value=12K1
R54 "100" Res_0603 71.055,-43.525 r90 top value=12K1
R55 "29.4" Res_0603 82.5,-44 r90 top value=12K1
R56 "560" Res_0603 80.375,-40 r180 top value=12K1
R57 "1k" Res_0603 60.818,-42.3 r180 top value=12K1
R58 "1.8M" Res_0603 85.302,-39.465 r90 top value=12K1
R59 "1.8M" Res_0603 87.302,-39.465 r90 top value=12K1
R60 "100" Res_0603 78.28,-48.5 r180 top value=12K1
R61 "1k" Res_0603 60.34,-45.34 r270 top value=12K1
R62 "1k" Res_0603 64.317,-42.8 r90 top value=12K1
R63 "1k" Res_0603 67.817,-51.8 r90 top value=12K1
R64 "100k" Res_0603 89.317,-45.42 r90 top value=12K1
R65 "1k" Res_0603 64.317,-46.3 r90 top value=12K1
R66 "1k" Res_0603 9.5,-25.901 r180 top value=12K1
R67 "1k" Res_0603 9.5,-32.17 r180 top value=12K1
R68 "75" Res_0603 12.21,-50.42 r180 top value=12K1
R69 "75" Res_0603 12.21,-48.42 r180 top value=12K1
R70 "75" Res_0603 12.21,-46.42 r180 top value=12K1
R71 "75" Res_0603 12.11,-41.87 r180 top value=12K1
R72 "75" Res_0603 12.11,-39.87 r180 top value=12K1
R73 "75" Res_0603 12.11,-37.87 r180 top value=12K1
R74 "1k5" Res_0603 15.6,-55.074 r180 top value=12K1
R75 "1k5" Res_0603 15.6,-45.107 r180 top value=12K1
TR1 "RQ5H020TNTL" "SOT-346-3 RQ5H020TN" 17.11,-49.37 r90 top
TR2 "RQ5H020TNTL" "SOT-346-3 RQ5H020TN" 17.11,-39.37 r90 top
U1 "MCU_LQFP144" LQFP144_0R5_SKT 38.38,-67.73 r180 top
U2 "NCP1117DT33G" DPACK 14.755,-15.12 r270 top
U3 "PQMCE1-S5-S5-S" "PQMCE1 (DC-DC conv.)" 2.11,-71.03 r90 top
U4 "PQMCE1-S5-S3-S" "PQMCE1 (DC-DC conv.)" 81.5,-2 r0 top
U5 "MCP1501-20 2.048V" "SOT23 MCP1501" 11.986,-67.273 r270 top
U6 "PQMCE1-S5-S3-S" "PQMCE1 (DC-DC conv.)" 60.48,-1.995 r0 top
U7 "USBLC6-4SC6" SOT23-6L 45.75,-27 r180 top
U8 "LAN8742A-CZ-TR" QFN24_0R5_4X4 38.5,-33.5 r0 top
U9 "KMS-1102NL" "Trans. KMS-1102NL" 38.5,-20.5 r0 top
U10 "AD8034ARZ" "8-SOIC_N AD8034ARZ" 74.5,-71 r0 top
U11 "ADuM1442ARSZ" "SSOP ADuM1442ARSZ" 71.5,-28.755 r180 top value=12K1
U12 "MAX31855K" SOIC127P600X175-8N 84.5,-29.255 r180 top
U13 "AD8034ARZ" "8-SOIC_N AD8034ARZ" 74.5,-56 r0 top
U14 "ADuM1442ARSZ" "SSOP ADuM1442ARSZ" 72.5,-16.04 r180 top value=12K1
U15 "MAX31855K" SOIC127P600X175-8N 84.5,-16.04 r180 top
U16 "AD8034ARZ" "8-SOIC_N AD8034ARZ" 74.818,-42.92 r0 top
X1 "LFXTAL065342 8M 30pF" LFXTAL065342Reel 36.34,-47.55 r270 top
X2 "X53T-C20SSA-25.000MHz" XTAL_2SM_5R0X3R2 28.75,-34.255 r90 top

## Footprints (in the part's own frame and the unit in brackets; to place one, negate y for a bottom-side part, rotate by r counter-clockwise, add the part's x,y. Pads: shape width x height; smd on the part's side, far side on the other; paste and mask are expansions set on the pad)
"8-SOIC_N AD8034ARZ" [mm]
  rect 2x0.7 smd: 1(0,0) 2(0,-1.27) 3(0,-2.54) 4(0,-3.81) 5(5,-3.81) 6(5,-2.54) 7(5,-1.27) 8(5,0)
  silkscreen extent 1.28,-4.44 3.19,0.97, body extent 0.55,-4.35 4.45,0.55, height 1.5
Cap_0603 [mm]
  rect 0.7x0.95 smd: 1(-0.687,0) 2(0.688,0) 2(0.688,0)
  body extent -0.76,-0.42 0.79,0.43, height 0.6
CAP_1206 [mm] "Chip Capacitor, Body 3.2x1.6mm, Height 1mm, IPC Medium Density"
  rect 1.15x1.8 smd: 1(-1.5,0) 2(1.5,0)
  silkscreen extent -0.55,-0.8 0.55,0.8, body extent -1.7,-0.9 1.7,0.9, height 1
"Connector 0.5/2-2.54" [mm]
  rect 1.65x1.65 hole 1.1: 1(-1.27,1.27)
  round 1.65 hole 1.1: 2(1.27,1.27)
  round 0.55 hole 1.1 unplated: MH1(-1.27,-1.27) MH2(1.27,-1.27)
  silkscreen extent -3.37,-1.83 2.77,4.37, body extent -2.77,-1.83 2.77,4.37, height 9
DPACK [mm]
  rect 1.6x3 smd: 1(-2.285,-3.61) 3(2.285,-3.61)
  rect 5.8x6.2 smd: 2(0.005,3.61)
  silkscreen extent -3.4,-5.4 3.4,7, body extent -3.25,-2.35 3.25,3.75, height 2.2
"header 2.54mm 4way" [mm]
  rect 1.7x1.7 hole 1: 1(0,7.62)
  round 1.7 hole 1: 2(0,5.08) 3(0,2.54) 4(0,0)
  silkscreen extent -1.38,-1.38 1.38,9.67, body extent -1.27,-1.27 1.27,8.89, height 11.6
"header 2.54mm 8way" [mm]
  rect 1.7x1.7 hole 1: 1(0,8.89)
  round 1.7 hole 1: 2(0,6.35) 3(0,3.81) 4(0,1.27) 5(0,-1.27) 6(0,-3.81) 7(0,-6.35) 8(0,-8.89)
  silkscreen extent -1.38,-10.26 1.38,10.9, body extent -1.27,-10.15 1.27,10.17, height 11.6
"LED 0603" [mm]
  rect 0.7x0.95 smd: 1(-152.187,-50.025) 2(-150.812,-50.025) 2(-150.812,-50.025)
  silkscreen extent -152.53,-50.77 -149.85,-49.27, body extent -152.26,-50.45 -150.71,-49.6, height 0.45
LFXTAL065342Reel [mm]
  rect 1.9x1.4 smd: 1(0,0) 2(0,-2.54) 3(6.2,-2.54) 4(6.2,0)
  silkscreen extent -1.22,-3.85 6.68,1.4, body extent -0.5,-3.85 6.7,1.35, height 1.2
LQFP144_0R5_SKT [mm] "32-bit MCU ARM-based Cortex-M3 20 X 20mm, 0.5mm Pitch, 1.6mm Max thickness"
  rect 0.3x1.65 smd: 1(-8.75,-10.625) 2(-8.25,-10.625) 3(-7.75,-10.625) 4(-7.25,-10.625) 5(-6.75,-10.625) 6(-6.25,-10.625) 7(-5.75,-10.625) 8(-5.25,-10.625) 9(-4.75,-10.625) 10(-4.25,-10.625) 11(-3.75,-10.625) 12(-3.25,-10.625) 13(-2.75,-10.625) 14(-2.25,-10.625) 15(-1.75,-10.625) 16(-1.25,-10.625) 17(-0.75,-10.625) 18(-0.25,-10.625) 19(0.25,-10.625) 20(0.75,-10.625) 21(1.25,-10.625) 22(1.75,-10.625) 23(2.25,-10.625) 24(2.75,-10.625) 25(3.25,-10.625) 26(3.75,-10.625) 27(4.25,-10.625) 28(4.75,-10.625) 29(5.25,-10.625) 30(5.75,-10.625) 31(6.25,-10.625) 32(6.75,-10.625) 33(7.25,-10.625) 34(7.75,-10.625) 35(8.25,-10.625) 36(8.75,-10.625) 73(8.75,10.625) 74(8.25,10.625) 75(7.75,10.625) 76(7.25,10.625) 77(6.75,10.625) 78(6.25,10.625) 79(5.75,10.625) 80(5.25,10.625) 81(4.75,10.625) 82(4.25,10.625) 83(3.75,10.625) 84(3.25,10.625) 85(2.75,10.625) 86(2.25,10.625) 87(1.75,10.625) 88(1.25,10.625) 89(0.75,10.625) 90(0.25,10.625) 91(-0.25,10.625) 92(-0.75,10.625) 93(-1.25,10.625) 94(-1.75,10.625) 95(-2.25,10.625) 96(-2.75,10.625) 97(-3.25,10.625) 98(-3.75,10.625) 99(-4.25,10.625) 100(-4.75,10.625) 101(-5.25,10.625) 102(-5.75,10.625) 103(-6.25,10.625) 104(-6.75,10.625) 105(-7.25,10.625) 106(-7.75,10.625) 107(-8.25,10.625) 108(-8.75,10.625)
  rect 1.65x0.3 smd: 37(10.625,-8.75) 38(10.625,-8.25) 39(10.625,-7.75) 40(10.625,-7.25) 41(10.625,-6.75) 42(10.625,-6.25) 43(10.625,-5.75) 44(10.625,-5.25) 45(10.625,-4.75) 46(10.625,-4.25) 47(10.625,-3.75) 48(10.625,-3.25) 49(10.625,-2.75) 50(10.625,-2.25) 51(10.625,-1.75) 52(10.625,-1.25) 53(10.625,-0.75) 54(10.625,-0.25) 55(10.625,0.25) 56(10.625,0.75) 57(10.625,1.25) 58(10.625,1.75) 59(10.625,2.25) 60(10.625,2.75) 61(10.625,3.25) 62(10.625,3.75) 63(10.625,4.25) 64(10.625,4.75) 65(10.625,5.25) 66(10.625,5.75) 67(10.625,6.25) 68(10.625,6.75) 69(10.625,7.25) 70(10.625,7.75) 71(10.625,8.25) 72(10.625,8.75) 109(-10.625,8.75) 110(-10.625,8.25) 111(-10.625,7.75) 112(-10.625,7.25) 113(-10.625,6.75) 114(-10.625,6.25) 115(-10.625,5.75) 116(-10.625,5.25) 117(-10.625,4.75) 118(-10.625,4.25) 119(-10.625,3.75) 120(-10.625,3.25) 121(-10.625,2.75) 122(-10.625,2.25) 123(-10.625,1.75) 124(-10.625,1.25) 125(-10.625,0.75) 126(-10.625,0.25) 127(-10.625,-0.25) 128(-10.625,-0.75) 129(-10.625,-1.25) 130(-10.625,-1.75) 131(-10.625,-2.25) 132(-10.625,-2.75) 133(-10.625,-3.25) 134(-10.625,-3.75) 135(-10.625,-4.25) 136(-10.625,-4.75) 137(-10.625,-5.25) 138(-10.625,-5.75) 139(-10.625,-6.25) 140(-10.625,-6.75) 141(-10.625,-7.25) 142(-10.625,-7.75) 143(-10.625,-8.25) 144(-10.625,-8.75)
  silkscreen extent -9.62,-10.82 -9.38,-10.58, body extent -9.65,-9.65 9.65,9.65, height 13
Mounting_Hole_3mm [mm]
  round 2.9 hole 3 unplated: MH1(0,0)
"PQMCE1 (DC-DC conv.)" [mm]
  round 1.3 hole 0.7: 1(0,0) 2(2.54,0) 4(7.38,0.06) 6(12.46,0.06)
  silkscreen extent -2.27,-5.18 17.52,1.43, body extent -2.2,-5.1 17.45,0.9, height 10.16
QFN24_0R5_4X4 [mm] "SQFN 24 Pins, Pitch 0.5mm, 4mmx4mm"
  rect 0.69x0.28 smd: 1(-1.9,1.25) 2(-1.9,0.75) 3(-1.9,0.25) 4(-1.9,-0.25) 5(-1.9,-0.75) 6(-1.9,-1.25) 13(1.9,-1.25) 14(1.9,-0.75) 15(1.9,-0.25) 16(1.9,0.25) 17(1.9,0.75) 18(1.9,1.25)
  rect 0.28x0.69 smd: 7(-1.25,-1.9) 8(-0.75,-1.9) 9(-0.25,-1.9) 10(0.25,-1.9) 11(0.75,-1.9) 12(1.25,-1.9) 19(1.25,1.9) 20(0.75,1.9) 21(0.25,1.9) 22(-0.25,1.9) 23(-0.75,1.9) 24(-1.25,1.9)
  rect 2.5x2.5 smd: 25(0,0)
  silkscreen extent -2.46,-2.05 2.05,2.05, body extent -2.05,-2.05 2.05,2.05, height 1
Res_0603 [mm]
  rect 0.7x0.95 smd: 1(-0.687,0) 2(0.688,0) 2(0.688,0)
  body extent -0.76,-0.42 0.79,0.43, height 0.45
RJ45_KRJ-CB4.2GYZNL [mm] "RJ45  connector, right angle"
  rect 1x1 hole 0.7: 1(3.57,2.65)
  round 1 hole 0.7: 2(2.55,3.75) 3(1.53,2.65) 4(0.51,3.75) 5(-0.51,2.65) 6(-1.53,3.75) 7(-2.55,2.65) 8(-3.57,3.75) 9(7.06,1.57) 10(4.77,1.57) 11(-4.77,1.57) 12(-7.06,1.57)
  oval 1x2.6 hole 0.7 slot 2.2 at 90 deg: 13(8.04,-3.75) 13(unconnected)(-8.04,-3.75)
  silkscreen extent -8.1,-8.8 8.1,3.5, body extent -8.1,-11.75 8.08,3.47, height 6.8
"SOD123 BZT52C30" [mm]
  rect 0.9x0.95 smd: 1(0,0) 2(3.15,0)
  silkscreen extent 0.25,-0.75 4.05,0.77, body extent 0.25,-0.77 2.9,0.78, height 1.05
"SOD-323 diode 1N4148WS-HG3-08" [mm] "1N4148WS-HG3-08"
  rect 0.8x0.6 smd: 1(-1.2,0) 2(1.2,0)
  silkscreen extent -1.8,-0.83 2,0.9, body extent -0.97,-0.72 0.98,0.78, height 13
SOIC127P600X175-8N [mm]
  rect 1.525x0.65 smd: 1(-2.712,1.905) 2(-2.712,0.635) 3(-2.712,-0.635) 4(-2.712,-1.905) 5(2.712,-1.905) 6(2.712,-0.635) 7(2.712,0.635) 8(2.712,1.905)
  silkscreen extent -2.37,-2.45 1.6,2.97, body extent -3,-2.45 3,2.45, height 1.75
"SOT23 BAT721" [mm]
  rect 0.6x0.7 smd: 1(0.95,1) 2(-0.95,1) 3(0,-1)
  silkscreen extent -1.45,-0.65 1.45,0.65, body extent -1.45,-0.65 1.45,0.65, height 1
"SOT23 MCP1501" [mm]
  rect 1.1x0.55 smd: 1(-1.45,2.4) 2(-1.45,1.45) 3(-1.45,0.5) 4(1.35,0.5) 5(1.35,1.45) 6(1.35,2.4)
  silkscreen extent -0.99,0.1 0.45,3.34
SOT23-6L [mm]
  rect 1.1x0.6 smd: 1(-1.2,0.95) 2(-1.2,0) 3(-1.2,-0.95) 4(1.2,-0.95) 5(1.2,0) 6(1.2,0.95)
  silkscreen extent -1.29,-1.5 0.25,1.92, body extent -0.86,-1.51 0.87,1.52, height 1.25
"SOT-346-3 RQ5H020TN" [mm]
  rect 0.7x0.9 smd: 1(-0.95,-1.05) 2(0.95,-1.05) 3(0,1.05)
  silkscreen extent -1.45,-0.82 1.43,0.82, body extent -1.45,-0.82 1.45,0.83, height 1
"SSOP ADuM1442ARSZ" [mm]
  rect 1.4x0.4 smd: 1(-3.2,2.7) 2(-3.2,2.05) 3(-3.2,1.4) 4(-3.2,0.75) 5(-3.2,0.1) 6(-3.2,-0.55) 7(-3.2,-1.2) 8(-3.2,-1.85) 9(-3.2,-2.5) 10(-3.2,-3.15) 11(3.8,-3.15) 12(3.8,-2.5) 13(3.8,-1.85) 14(3.8,-1.2) 15(3.8,-0.55) 16(3.8,0.1) 17(3.8,0.75) 18(3.8,1.4) 19(3.8,2.05) 20(3.8,2.7)
  silkscreen extent -2.27,-3.48 2.3,3.57, body extent -2.35,-3.8 2.95,3.4, height 2
"Trans. KMS-1102NL" [mm]
  rect 0.64x1.4 smd: 1(-4.445,-4.51) 2(-3.175,-4.51) 3(-1.905,-4.51) 4(-0.635,-4.51) 5(0.635,-4.51) 6(1.905,-4.51) 7(3.175,-4.51) 8(4.445,-4.51) 9(4.445,4.51) 10(3.175,4.51) 11(1.905,4.51) 12(0.635,4.51) 13(-0.635,4.51) 14(-1.905,4.51) 15(-3.175,4.51) 16(-4.445,4.51)
  silkscreen extent -6.43,-5.04 6.38,3, body extent -6.4,-3 6.4,3, height 6
XTAL_2SM_5R0X3R2 [mm] "CRYSTAL 25M Hz  30F SMD 2 pads"
  rect 1.8x2.2 smd: 1(-1.9,0) 2(1.9,0)
  silkscreen extent -2.5,-1.6 2.5,1.6, body extent -2.5,-1.6 2.5,1.6, height 1.3

## Part data
C1 C2 C3 C4 C5 C6 C9 C10 C13 C14 C20: library part "Cap 4.7uF 0603 10%"
C7 C8 C44 C49: library part "Cap 30 pF 0603"
C11 C12: library part "Cap 2.2uF 0603 10%"
C15 C16 C17 C53 C56 C61 C67: library part "Cap 82pF 0603 10%"
C18 C19 C21 C22 C23 C24 C25 C26 C27 C28 C29 C30 C31 C32 C33 C34 C35 C36 C37 C38 C41 C45 C46 C47 C48 C50 C51 C55 C59 C60 C64: library part "Cap 100nF 0603 10%"
C39: library part "Cap 470pF 0603 10%"
C40 C75 C79: library part "Cap 1uF 0603 10%"
C42: library part "Cap 1nF 2kV", "Capacitor 1nF 2kV", Revision="July-2002: Re-released for DXP Platform."
C43: library part "Cap 10uF 0603 10%"
C52 C58 C66: library part "Cap 10pF 0603 10%"
C54 C62 C68: library part "Cap 6pF 0603 10%"
C57 C65 C70 C71 C72 C73 C74 C76 C77 C78: library part "Cap 10nF 0603 10%"
CN1 CN2 CN3 CN8 CN9 CN10 CN11 CN12 CN13 CN14 CN15 CN16: library part "Phoenix Contact MPT 0.5/2-2.54", "Phoenix Contact MPT 0.5/2-2.54"
CN4 CN5: library part "Header plug 2.54mm 4 way"
CN6: library part "Header plug 2.54mm 8 way"
CN7: "100 Base-TX (Fast Ethernet) SMD RJ45 single port (1x1) with LEDS Integrated Magnetics Connector", Manuf_1=HanRun, Manuf_2="Pulse Electronics Corporation", Manuf_3="K.O.D International Holding", Manuf_Part_1=HR961160C, Manuf_Part_2=J3011G21DNLT, Manuf_Part_3=RMT-119A-12F6-GY-04, Distrib="Sub Co"
D1 D2 D7 D8 D13 D14 D19 D20: library part "zener diode BZT52C30", "Zener Diode", LatestRevisionDate=17-Jul-2002, LatestRevisionNote="Re-released for DXP Platform.", PackageDescription="Diode, Thru-Hole; 2 Leads; 0.7 in Pin Spacing", PackageReference=DIODE-0.7, Published=8-Jun-2000, Publisher="Altium Limited"
D3 D4 D9 D10 D15 D16: library part "Diode 1N4148WS-HG3-08", Code_JEDEC=DO-214-AB, LatestRevisionDate=17-Jul-2002, LatestRevisionNote="Re-released for DXP Platform.", PackageDescription="DO-214-AB/SMC; 2 C-Bend Leads; Body 7.9 x 5.9 mm, inc. leads (LxW)", PackageReference=SMC, PackageVersion=Sep-1996, Published=8-Jun-2000, Publisher="Altium Limited"
D5 D6 D11 D12 D17 D18: library part "Diode BAT721", "Schottky diode BAT721", Code_JEDEC=DO-214-AB, LatestRevisionDate=17-Jul-2002, LatestRevisionNote="Re-released for DXP Platform.", PackageDescription="DO-214-AB/SMC; 2 C-Bend Leads; Body 7.9 x 5.9 mm, inc. leads (LxW)", PackageReference=SMC, PackageVersion=Sep-1996, Published=8-Jun-2000, Publisher="Altium Limited"
L1 L2: library part Inductor, "Inductor", Published=8-Jun-2000, Publisher="Altium Limited", Revision="July-2002: Re-released for DXP Platform."
LED1: library part "LED 0603"
R1 R2 R3 R31 R35 R36 R37 R39 R44 R48 R49 R50 R52 R57 R61 R62 R63 R65 R66 R67: library part "Res 1k 1% 0603", Manuf_1=VISHAY, Manuf_Part_1="MCT 0603-50 1% P5 12K1", Distrib=FARNELL, ECCN_US/EU=n/a, Order=2325243
R4 R5 R6 R7 R9 R23 R25: library part "Res 10k 1% 0603", Manuf_1=VISHAY, Manuf_Part_1="MCT 0603-50 1% P5 12K1", Distrib=FARNELL, ECCN_US/EU=n/a, Order=2325243
R8 R74 R75: library part "Res 1k5 1% 0603", Manuf_1=VISHAY, Manuf_Part_1="MCT 0603-50 1% P5 12K1", Distrib=FARNELL, ECCN_US/EU=n/a, Order=2325243
R10 R11 R12 R13: library part "Res 50 1% 0603", Manuf_1=VISHAY, Manuf_Part_1="MCT 0603-50 1% P5 12K1", Distrib=FARNELL, ECCN_US/EU=n/a, Order=2325243
R14 R15 R21: library part "Res 33 1% 0603", Manuf_1=VISHAY, Manuf_Part_1="MCT 0603-50 1% P5 12K1", Distrib=FARNELL, ECCN_US/EU=n/a, Order=2325243
R16 R17 R18 R19 R68 R69 R70 R71 R72 R73: library part "Res 75 1% 0603", Manuf_1=VISHAY, Manuf_Part_1="MCT 0603-50 1% P5 12K1", Distrib=FARNELL, ECCN_US/EU=n/a, Order=2325243
R20: library part "Res 12k1 1% 0603", Manuf_1=VISHAY, Manuf_Part_1="MCT 0603-50 1% P5 12K1", Distrib=FARNELL, ECCN_US/EU=n/a, Order=2325243
R22 R24: library part "Res 270 1% 0603", Manuf_1=VISHAY, Manuf_Part_1="MCT 0603-50 1% P5 12K1", Distrib=FARNELL, ECCN_US/EU=n/a, Order=2325243
R26: library part "Res 0 1% 0603", Manuf_1=VISHAY, Manuf_Part_1="MCT 0603-50 1% P5 12K1", Distrib=FARNELL, ECCN_US/EU=n/a, Order=2325243
R27 R28 R34 R40 R41 R47 R53 R54 R60: library part "Res 100 1% 0603", Manuf_1=VISHAY, Manuf_Part_1="MCT 0603-50 1% P5 12K1", Distrib=FARNELL, ECCN_US/EU=n/a, Order=2325243
R29 R42 R55: library part "Res 29.4 1% 0603", Manuf_1=VISHAY, Manuf_Part_1="MCT 0603-50 1% P5 12K1", Distrib=FARNELL, ECCN_US/EU=n/a, Order=2325243
R30 R43 R56: library part "Res 560 1% 0603", Manuf_1=VISHAY, Manuf_Part_1="MCT 0603-50 1% P5 12K1", Distrib=FARNELL, ECCN_US/EU=n/a, Order=2325243
R32 R33 R45 R46 R58 R59: library part "Res 1.8M 1% 0603", Manuf_1=VISHAY, Manuf_Part_1="MCT 0603-50 1% P5 12K1", Distrib=FARNELL, ECCN_US/EU=n/a, Order=2325243
R38 R51 R64: library part "Res 100k 1% 0603", Manuf_1=VISHAY, Manuf_Part_1="MCT 0603-50 1% P5 12K1", Distrib=FARNELL, ECCN_US/EU=n/a, Order=2325243
TR1 TR2: "MOSFET N-CH 60V 2A 500mW"
U2: "Voltage regulator output 3.3V 800mA (JLC PCB) DPACK"
U3: "DC-DC isolated coverter 5V to 5V"
U4 U6: "DC-DC isolated coverter 5V to 3.3V"
U5: library part MCP1501, "Voltage reference MCP1501T-20E/CHY"
U8: "LAN8742A-CZ-TR - Small Footprint RMII 10/100 Ethernet, Transceiver with HP Auto-MDIX and flexPWR Technology SQFN-24", Manuf_1=MICROCHIP, Distrib=MICROCHIP, Manuf_Part_1=LAN8742A-CZ-TR, Order=LAN8742A-CZ-TR
U9: library part KMS-1102NL_1
U10 U13 U16: "dual op amp", ComponentLink1Description="Manufacturer Link", ComponentLink1URL=http://www.analog.com/, DatasheetVersion="REV. B", LatestRevisionDate=17-Jul-2002, LatestRevisionNote="Re-released for DXP Platform.", PackageDescription="Can; 8 Leads; Pin Circle Dia. 5.08 mm; Lead Dia. 0.53 mm (max)", PackageReference=H-08A, PackageVersion=1990, Published=8-Jun-2000, Publisher="Altium Limited"
U11 U14: "ADuM1442ARSZ isolator", Manuf_1=VISHAY, Manuf_Part_1="MCT 0603-50 1% P5 12K1", Distrib=FARNELL, ECCN_US/EU=n/a, Order=2325243
U12 U15: "Thermocouple to digital converter"
X1: library part LFXTAL065342
X2: "Crystal Oscillator 25M", LatestRevisionDate=17-Jul-2002, LatestRevisionNote="Re-released for DXP Platform.", PackageReference=R38, Published=8-Jun-2000, Publisher="Altium Limited"

## Via types
v1: diameter 0.45, hole 0.25, Top Layer to Bottom Layer, 224 vias
v2: diameter 0.4, hole 0.2, Top Layer to Bottom Layer, 66 vias
v3: diameter 0.7, hole 0.4, Top Layer to Bottom Layer, 8 vias
v4: diameter 0.66, hole 0.33, Top Layer to Bottom Layer, 2 vias

## Nets (pads, with @x,y where several pads share a name; then routed paths per layer and width w, separated by ;. In a path a pad name is that pad's centre, name@x,y a point inside that pad or via, vN(x,y) a via of type N, cw(c..) or ccw(c..) an arc to the next point about the centre after c; other vN are vias at no path point)
0V_TC1: C10.1 C50.1 C55.2 U4.4 U11.2 U11.4 U11.7 U11.10 U12.1 | length 59.1
  Top Layer w0.3: U11.4@74.7,-29.505 73.38,-29.505 73.345,-29.54 ; U11.7@74.7,-27.555 73.425,-27.555 73.345,-27.475 ; U11.10@74.7,-25.605 74.69,-25.595 73.786,-25.595 73.345,-26.036 73.345,-27.475 ; C50.1@76.912,-33.005 76.912,-32.215 ; v1(84.865,-25.07) 86.127,-25.07 C55.2@86.312,-25.255 86.312,-25.38 85.825,-25.867 85.825,-31.16 ; U12.1@87.212,-31.16 85.825,-31.16 ; U4.4@88.88,-1.94 91.103,-4.163 C10.1@91.103,-8.695 91.08,-8.718 91.095,-8.732 v1(91.095,-11.255) ; 73.345,-29.54 73.345,-30.36 73.74,-30.755 74.65,-30.755 U11.2@74.7,-30.805 75.925,-30.805 76.912,-31.792 76.912,-32.215 ; 73.345,-29.54 73.345,-27.475 ; 76.912,-32.215 77.062,-32.065 83.485,-32.065 84.39,-31.16 85.825,-31.16
  Bottom Layer w0.3: v1(84.865,-25.07) 84.78,-24.985 84.78,-24.365 91.095,-18.05 v1(91.095,-11.255)
0V_TC2: C14.1 C59.1 C64.2 U6.4 U14.2 U14.4 U14.7 U14.10 U15.1 | length 47.2
  Top Layer w0.3: U6.4@67.86,-1.935 67.86,-6.882 69.443,-8.465 C14.1@69.443,-8.59 69.443,-8.715 72.303,-11.575 v1(73.86,-11.575) ; U14.4@75.7,-16.79 74.444,-16.79 ; U14.7@75.7,-14.84 74.459,-14.84 74.444,-14.855 ; v1(76.875,-12.05) 76.846,-12.079 76.846,-12.519 76.475,-12.89 U14.10@75.7,-12.89 75.65,-12.94 74.976,-12.94 74.444,-13.471 74.444,-14.855 ; C59.1@77.172,-20.15 77.172,-19.145 ; 86.15,-17.945 U15.1@87.212,-17.945 ; C64.2@86.237,-12.01 85.9,-12.347 85.9,-17.945 84.495,-17.945 83.295,-19.145 77.172,-19.145 ; 74.444,-16.79 74.444,-14.855 ; 74.444,-16.79 74.444,-17.814 74.67,-18.04 75.65,-18.04 U14.2@75.7,-18.09 75.75,-18.14 76.424,-18.14 77.172,-18.888 77.172,-19.145
  Bottom Layer w0.3: v1(73.86,-11.575) 73.865,-11.575 74.34,-12.05 v1(76.875,-12.05)
3.3V: C3.2 C4.2 C18.2 C20.2 C21.2 C22.2 C23.2 C24.2 C25.2 C26.2 C27.2 C28.2 C29.2 C30.2 C31.2 C32.2 C33.2 C34.2 C35.2 C36.2 C37.2 C41.2 C51.2 C60.2 CN2.1 L1.1 L2.2 R1.1 R5.2 R6.2 R7.2 R8.1 R9.2 U1.6 U1.17 U1.30 U1.39 U1.52 U1.62 U1.72 U1.84 U1.95 U1.108 U1.121 U1.131 U1.143 U1.144 U2.2 U5.4 U5.6 U8.9 U11.20 U14.20 | length 159.9
  Top Layer w0.147: C3.2@14.538,-8.7 C3.2@14.563,-8.675
  Top Layer w0.15: CN2.1@4.144,-78 CN2.1@4.894,-77.25 ; R1.1@10.067,-5.47 11.483,-5.47 ; U5.4@12.486,-68.623 12.686,-68.823 12.686,-69.485 13.554,-70.353 C18.2@13.554,-70.478 ; L2.2@50.938,-30.411 50.938,-30.464 L2.2@50.973,-30.5
  Top Layer w0.2: C3.2@14.538,-8.7 C3.2@14.538,-8.525
  Top Layer w0.25: 32.8,-37.962 32.85,-37.912 ; R6.2@33.81,-37.962 R6.2@33.935,-37.962 ; v1@34.582,-37.315 34.582,-37.179 v1(34.611,-37.15) ; R7.2@39.722,-38.488 39.725,-38.491 v1(39.725,-39.37) ; R8.1@41.602,-38.55 41.575,-38.577 v1(41.575,-39.35) 41.575,-41.635 v1(42.45,-42.51)
  Top Layer w0.3: C18.2@13.554,-70.478 13.554,-70.353 14.284,-69.623 14.284,-68.724 U5.6@14.386,-68.623 14.438,-68.675 v2(15.45,-68.675) ; C4.2@14.513,-10.575 C4.2@14.54,-10.603 ; C3.2@14.563,-8.675 C3.2@14.587,-8.65 ; U2.2@18.165,-15.125 U2.2@18.365,-15.125 ; C27.2@25.025,-67.062 25.15,-67.062 25.681,-66.532 26.156,-66.532 v1(26.185,-66.503) ; C26.2@25.075,-71.438 25.118,-71.48 26.287,-71.48 ; C21.2@25.188,-77.325 25.188,-77.2 25.907,-76.48 ; v1@26.208,-66.48 U1.52@27.755,-66.48 ; v1(26.23,-72.225) 26.23,-71.538 26.287,-71.48 ; L1.1@26.245,-55.9 26.266,-55.921 26.266,-57.529 26.287,-57.55 26.224,-57.613 26.224,-58.475 25.85,-58.849 v1(25.85,-59.975) 26.851,-59.975 26.856,-59.98 U1.39@27.755,-59.98 ; v1(26.6,-77.232) 25.907,-76.54 25.907,-76.48 ; U1.72@27.755,-76.48 25.907,-76.48 ; U1.62@27.755,-71.48 26.287,-71.48 ; v1(31.83,-54.75) 31.789,-54.75 31.665,-54.874 31.05,-54.874 C31.2@30.85,-55.074 30.975,-55.074 31.641,-55.74 32.164,-55.74 32.63,-56.206 U1.30@32.63,-57.105 ; C41.2@31.9,-37.912 32.85,-37.912 R6.2@33.8,-37.912 ; R6.2@33.935,-37.962 33.935,-37.902 34.248,-37.59 34.308,-37.59 v1@34.582,-37.315 ; C25.2@34.458,-80.275 35.026,-79.706 35.13,-79.81 ; C22.2@35.933,-80.225 35.545,-80.225 35.13,-79.81 ; v1@36.075,-76.87 v1(36.075,-76.93) 36.046,-76.958 35.414,-76.958 35.13,-77.242 U1.84@35.13,-78.355 35.13,-79.81 ; v1(38.25,-36.25) U8.9@38.25,-35.4 ; v1(38.547,-58.817) 38.576,-58.788 38.952,-58.788 39.125,-58.615 39.125,-58.433 39.13,-58.428 U1.17@39.13,-57.105 39.13,-55.653 40.295,-54.488 C30.2@40.42,-54.488 ; v1(39.65,-76.091) 40.63,-77.071 U1.95@40.63,-78.355 ; U1.95@40.63,-78.38 40.63,-79.597 41.133,-80.1 C24.2@41.133,-80.225 C29.2@43.212,-80.225 ; v1(44.4,-58.57) 44.429,-58.541 44.429,-58.206 44.63,-58.004 U1.6@44.63,-57.105 44.63,-54.378 C33.2@44.65,-54.358 44.668,-54.34 46.467,-54.34 C36.2@46.485,-54.323 ; v1(45.565,-39.312) 45.565,-38.533 R5.2@45.52,-38.488 R5.2@45.645,-38.488 ; U1.108@47.13,-78.355 47.13,-78.03 47.727,-78.03 ; v1(47.794,-79.05) 47.794,-78.096 47.727,-78.03 ; 48.05,-70.48 U1.121@49.005,-70.48 50,-70.48 C34.2@51.021,-69.459 ; C23.2@48.812,-78.355 48.812,-78.23 48.612,-78.03 47.727,-78.03 ; U1.131@49.005,-65.48 50.02,-65.48 50.125,-65.375 C37.2@51.587,-65.375 ; U1.143@49.005,-59.48 50.499,-59.48 50.545,-59.526 ; U1.144@49.005,-58.98 C28.2@50.972,-58.98 ; R9.2@49.4,-38.558 49.427,-38.584 49.42,-38.591 49.428,-38.599 v1(49.428,-39.381) ; v1(50.389,-69.125) 50.418,-69.154 50.716,-69.154 C34.2@51.021,-69.459 ; v1(50.55,-64.591) 51.027,-65.069 C37.2@51.281,-65.069 ; 50.887,-65.213 C37.2@51.425,-65.213 ; L2.2@50.973,-30.5 v1(51.875,-30.5) ; C28.2@50.975,-58.977 C28.2@50.972,-58.98 ; C34.2@51.117,-70.205 51.317,-70.005 C34.2@51.317,-69.88 51.317,-69.755 C34.2@51.021,-69.459 ; v1(66.725,-33.175) C51.2@67.687,-33.175 ; v1(67.3,-20.485) 68.678,-20.485 C60.2@68.682,-20.49 68.682,-18.757 U14.20@68.7,-18.74 ; C51.2@67.647,-33.215 C51.2@67.687,-33.175 ; U11.20@67.7,-31.455 67.742,-31.455 67.792,-31.505 C51.2@67.792,-33.07 ; 50.545,-59.526 51.117,-60.098 51.117,-64.905 C37.2@51.281,-65.069 ; 50.545,-59.526 50.972,-59.099 C28.2@50.972,-58.98 ; C37.2@51.281,-65.069 C37.2@51.425,-65.213 ; C37.2@51.281,-65.069 51.387,-65.069 51.587,-65.269 C37.2@51.587,-65.375 ; C37.2@51.425,-65.213 C37.2@51.587,-65.375 ; C51.2@67.687,-33.175 C51.2@67.792,-33.07 ; C51.2@67.687,-33.175 67.772,-33.175 C51.2@67.792,-33.195 C51.2@67.792,-33.07
  Top Layer w0.4: C4.2@14.513,-10.575 14.538,-10.55 C3.2@14.538,-8.7 ; C4.2@14.54,-10.603 14.54,-11.5 U2.2@18.165,-15.125
  Top Layer w0.5: C3.2@14.587,-8.65 v1(15.55,-8.65) ; v1(26.425,-47.082) 26.466,-47.082 26.797,-46.75 v1(31.095,-46.75)
  Top Layer w0.7: v1(23.2,-57.8) C20.2@23.2,-56.838
  Top Layer w1: 21.525,-17.55 21.625,-17.45 ; 21.625,-12.225 21.625,-12.9 ; v3(22.325,-15.85) 21.625,-15.85 U2.2@19.09,-15.85 ; U2.2@19.09,-15.85 20.55,-17.31 20.55,-19.4 v3@21.5,-20.35 ; U2.2@19.09,-15.85 U2.2@18.365,-15.125 U2.2@20.425,-13.065 ; U2.2@20.425,-13.065 20.425,-11.025 v3(20.425,-10.85) 21.475,-10.85 22.375,-11.75 v3(22.375,-12.9) ; U2.2@20.425,-13.065 20.59,-12.9 21.625,-12.9 ; v3@21.5,-20.35 21.5,-19.425 21.525,-19.4 ; v3@21.5,-20.35 v3(21.525,-20.375) 21.525,-19.4 ; 21.525,-19.4 22.35,-18.575 v3(22.35,-17.625) 22.35,-16.845 22.375,-16.82 v3(22.375,-14.4) v3(22.375,-12.9) ; 21.625,-12.9 v3(22.375,-12.9)
  Top Layer w1.3: v3@20.425,-11.025 21.625,-12.225 ; 21.525,-19.4 21.525,-17.55 ; 21.625,-17.45 21.625,-15.85 21.625,-12.9
  Bottom Layer w0.25: v1(42.45,-42.51) 44.39,-42.51 v1(44.4,-42.5)
  Bottom Layer w0.3: v1(49.428,-39.381) 49.428,-32.947 v1(51.875,-30.5)
  other v1: 11.737,-5.55
  other v3: 21.075,-19.175 22.15,-11.425
3.3V_TC1: C10.2 C50.2 C55.1 U4.6 U11.1 U12.4 | length 54.7
  Top Layer w0.3: C50.2@75.537,-33.005 75.537,-31.792 75.2,-31.455 U11.1@74.7,-31.455 73.555,-31.455 72.745,-30.645 72.745,-25.835 74.49,-24.09 87.345,-24.09 87.585,-24.33 87.585,-25.153 C55.1@87.687,-25.255 ; U12.4@87.212,-27.35 87.512,-27.35 87.687,-27.175 C55.1@87.687,-25.255 ; v1(88.985,-24.485) 88.956,-24.514 88.429,-24.514 88.012,-24.93 87.888,-24.93 87.687,-25.13 C55.1@87.687,-25.255 ; v1(92.48,-11.255) 92.478,-11.252 C10.2@92.478,-8.695 92.478,-3.422 U4.6@93.96,-1.94
  Bottom Layer w0.3: v1(88.985,-24.485) 92.48,-20.99 v1(92.48,-11.255)
3.3V_TC2: C14.2 C59.2 C64.1 U6.6 U14.1 U15.4 | length 39.8
  Top Layer w0.3: U6.6@72.94,-1.935 72.94,-6.343 70.818,-8.465 C14.2@70.818,-8.59 73.745,-8.59 76.12,-10.965 ; C59.2@75.797,-20.15 75.797,-18.79 75.747,-18.74 U14.1@75.7,-18.74 75.65,-18.69 74.684,-18.69 73.8,-17.806 73.8,-13.285 76.12,-10.965 ; U15.4@87.212,-14.135 87.437,-14.135 87.612,-13.96 C64.1@87.612,-12.01 87.612,-11.885 86.692,-10.965 76.12,-10.965
5V: C1.2 C2.2 C5.2 C9.2 C13.2 C72.2 C73.2 C74.2 C75.2 CN3.2 U2.3 U3.1 U4.1 U6.1 U10.8 U13.8 U16.8 | length 334.3
  Top Layer w0.3: v1(7.12,-73.975) 7.9,-73.195 7.9,-71.034 ; C5.2@9.121,-71.031 C5.2@9.128,-71.037 ; v1(24.6,-40.825) v1@24.6,-40.787 ; C13.2@58.656,-8.844 C13.2@58.812,-9 C13.2@58.806,-9.006 ; v1(58.8,-10.8) v1@58.806,-10.794 ; v1(76.175,-79.555) 77.162,-79.555 C75.2@77.177,-79.57 ; C74.2@76.97,-69.338 76.97,-70.62 v1(77.75,-71.4) 77.791,-71.4 78.05,-71.141 79.359,-71.141 U10.8@79.5,-71 ; C73.2@77.055,-54.343 77.055,-55.615 v1(77.775,-56.335) 77.816,-56.335 78.05,-56.101 79.399,-56.101 U13.8@79.5,-56 ; C72.2@77.345,-40.738 77.345,-42.834 77.781,-43.27 v1(77.795,-43.27) 77.836,-43.27 78.186,-42.92 U16.8@79.818,-42.92
  Top Layer w0.4: C1.2@12.312,-21.7 C1.2@12.312,-21.575
  Top Layer w0.5: U3.1@2.11,-71.03 2.114,-71.034 7.9,-71.034 ; v1(6.9,-20.15) 8.35,-18.7 8.35,-17.44 ; v1(7.95,-67.15) 7.95,-70.984 7.9,-71.034 ; C5.2@9.121,-71.031 9.119,-71.034 7.9,-71.034 ; U2.3@11.145,-17.405 11.737,-17.405 12.287,-17.955 C2.2@12.287,-19.9 12.3,-19.913 12.3,-21.562 C1.2@12.312,-21.575 ; C1.2@12.312,-21.7 21.775,-31.163 21.775,-37.962 v1@24.6,-40.787 ; v1(27.075,-43.3) 29.5,-45.725 v1(41.375,-45.725) ; C13.2@58.712,-8.844 58.744,-8.844 58.812,-8.775 58.812,-3.662 U6.1@60.48,-1.995 ; v1@58.806,-10.794 C13.2@58.806,-9.006 ; v1(80.025,-8.975) 80.444,-8.556 81.6,-8.556 C9.2@81.619,-8.538 ; U4.1@81.5,-2 81.569,-2.069 81.569,-8.488 C9.2@81.619,-8.538 ; C9.2@81.637,-8.556 C9.2@81.619,-8.538
  Top Layer w0.7: CN3.2@4.15,-16.54 4.407,-16.54 5.307,-17.44 8.35,-17.44 U2.3@11.11,-17.44
  Top Layer w1: U2.3@11.11,-17.44 U2.3@11.145,-17.405
  Bottom Layer w0.3: v1(7.12,-73.975) 7.12,-75.025 14.685,-82.59 74.175,-82.59 76.577,-80.188 ; v1(76.175,-79.555) 76.175,-79.596 76.577,-79.998 76.577,-80.188 ; v1(77.795,-43.27) 77.785,-43.28 77.785,-56.325 v1(77.775,-56.335) 77.762,-56.348 77.762,-71.388 v1(77.75,-71.4) 77.75,-78.955 77.585,-79.12 77.585,-79.18 76.577,-80.188
  Bottom Layer w0.5: v1(6.9,-20.15) 6.9,-65.65 7.95,-66.7 v1(7.95,-67.15) ; v1(24.6,-40.825) v1(27.075,-43.3) ; v1(41.375,-45.725) 49.075,-45.725 58.8,-36 v1(58.8,-10.8) 78.2,-10.8 v1(80.025,-8.975)
-5V: C6.2 C76.2 C77.2 C78.2 C79.2 U3.4 U10.4 U13.4 U16.4 | length 132.6
  Top Layer w0.3: U3.4@2.05,-63.65 2.107,-63.593 U3.4@2.194,-63.506 ; C6.2@8.671,-63.679 C6.2@8.815,-63.535 ; v1(73.17,-81.475) 73.942,-81.475 C79.2@74.102,-81.635 ; v1(73.965,-76.66) 73.984,-76.641 C76.2@75.04,-76.641 ; U16.4@74.818,-46.73 74.83,-46.73 75.03,-46.93 v1(75.03,-47.79) 75.507,-48.267 75.507,-48.62 C77.2@75.575,-48.687 ; U13.4@75,-59.91 v1(75,-60.825) 75,-60.852 75.03,-60.882 75.03,-61.837 75.23,-62.037 C78.2@75.355,-62.037 ; C76.2@75.04,-76.65 C76.2@75.04,-76.641 ; 75.04,-75.207 C76.2@75.04,-76.641 ; C76.2@75.195,-76.572 75.127,-76.641 C76.2@75.04,-76.641
  Top Layer w0.5: U3.4@2.107,-63.593 8.629,-63.593 C6.2@8.671,-63.635 ; U10.4@74.5,-74.81 U10.4@74.643,-74.81 ; U13.4@74.5,-59.81 74.9,-59.81 U13.4@75,-59.91
  Bottom Layer w0.3: U3.4@2.05,-63.65 8.603,-70.203 8.603,-75.345 15.288,-82.03 71.797,-82.03 72.836,-80.991 ; v1(73.17,-81.475) 73.17,-81.434 72.968,-81.232 72.968,-81.123 72.836,-80.991 ; v1(75.03,-47.79) 75.015,-47.805 75.015,-60.81 v1(75,-60.825) 73.965,-61.86 v1(73.965,-76.66) 73.965,-79.862 72.836,-80.991
GND: C1.1 C2.1 C3.1 C4.1 C5.1 C6.1 C7.1 C8.1 C9.1 C11.2 C12.2 C13.1 C15.1 C16.1 C17.1 C18.1 C19.1 C20.1 C21.1 C22.1 C23.1 C24.1 C25.1 C26.1 C27.1 C28.1 C29.1 C30.1 C31.1 C32.1 C33.1 C34.1 C35.1 C36.1 C37.1 C38.1 C39.1 C40.1 C41.1 C43.1 C44.1 C45.1 C46.1 C47.1 C48.1 C49.1 C51.1 C53.1 C54.1 C56.1 C60.1 C61.1 C62.1 C67.1 C68.1 C70.2 C71.2 C72.1 C73.1 C74.1 C75.1 C76.1 C77.1 C78.1 C79.1 CN1.2 CN3.1 CN4.2 CN4.4 CN5.2 CN5.4 CN6.2 CN6.4 CN6.6 CN6.8 CN8.1 CN10.1 CN12.1 CN13.1 CN14.1 CN15.2 CN16.2 D2.1 D3.1 D4.2 D5.1 D6.1 D8.1 D9.1 D10.2 D11.1 D12.1 D14.1 D15.1 D16.2 D17.1 D18.1 D19.1 D20.1 LED1.2 R4.1 R20.1 R22.1 R23.1 R24.1 R25.2 R26.1 R29.1 R38.1 R42.1 R51.1 R55.1 R64.1 TR1.3 TR2.3 U1.16 U1.31 U1.38 U1.51 U1.61 U1.83 U1.94 U1.107 U1.120 U1.130 U2.1 U3.2 U3.6 U4.2 U5.2 U5.3 U5.5 U6.2 U7.2 U8.25 U11.11 U11.14 U11.19 U14.11 U14.14 U14.19 X1.2 X1.4 | length 157.2
  Top Layer w0.15: v1(21.348,-7.127) R22.1@22.696,-7.127 ; v1(24.425,-31.24) 24.425,-32.22 C44.1@24.56,-32.355 ; v1(24.51,-37.17) 24.51,-36.205 C49.1@24.56,-36.155 ; R23.1@49.537,-10.875 49.602,-10.94 v1(50.625,-10.94) ; R24.1@50.09,-6.685 v1(51.155,-6.685) ; LED1.2@55.425,-75.475 55.55,-75.475 56.006,-75.019 56.006,-74.694 v2(56.025,-74.675) ; D17.1@58.744,-49.776 v1@58.744,-48.964 ; D5.1@58.767,-78.3 58.823,-78.245 58.823,-77.777 v1(59.3,-77.3) ; D11.1@58.781,-63.286 v1@58.781,-62.354 ; D6.1@62.268,-78.3 62.373,-78.195 62.373,-77.777 v1(62.85,-77.3) ; D18.1@62.268,-49.8 62.268,-49.75 62.492,-49.525 62.543,-49.525 62.603,-49.465 v1(63.13,-49.465) ; D12.1@62.269,-63.299 v1(62.27,-62.41) ; v1@69.804,-66.556 D9.1@69.804,-65.514 ; v1(69.81,-53.585) 69.81,-52.507 D15.1@69.817,-52.5 ; v1@69.829,-81.494 D3.1@69.829,-80.511 ; v1(71.64,-81.28) 71.64,-80.195 D4.2@71.826,-80.009 ; v1@71.809,-66.236 D10.2@71.809,-65.009 ; D16.2@71.817,-52 71.85,-52.033 v1(71.85,-53.21) ; v1(82.5,-73.7) R29.1@82.5,-72.687 ; R42.1@82.5,-57.687 82.573,-57.76 v1(83.585,-57.76) ; R51.1@85.192,-62.152 85.195,-62.155 v1(86.2,-62.155) 87.19,-62.155 C61.1@87.192,-62.152 87.205,-62.14 v1(88.215,-62.14) 89.18,-62.14 C62.1@89.192,-62.152 ; C54.1@85.318,-77.729 85.33,-77.742 v1(86.3,-77.742) 86.337,-77.779 87.093,-77.779 C53.1@87.368,-78.054 ; C68.1@85.318,-46.107 85.35,-46.14 v1(86.285,-46.14) 87.285,-46.14 C67.1@87.318,-46.107 87.345,-46.135 v1(88.33,-46.135) 89.29,-46.135 R64.1@89.317,-46.107 ; C53.1@87.419,-78.054 87.642,-77.831 89.144,-77.831 R38.1@89.368,-78.054
  Top Layer w0.3: C6.1@8.793,-64.933 C6.1@8.815,-64.91 ; v1(11.866,-63.575) 12.798,-63.575 12.998,-63.375 C17.1@12.998,-63.373 ; U5.5@13.436,-68.623 13.399,-68.585 13.399,-67.979 13.449,-67.928 v1(13.449,-67.224) 13.443,-67.218 13.443,-65.829 U5.2@13.436,-65.823 ; C70.2@14.922,-52.87 14.971,-52.821 14.971,-50.629 v1(15,-50.6) 15.029,-50.571 15.029,-50.301 15.96,-49.37 TR1.3@16.06,-49.37 ; C71.2@14.922,-42.87 15.121,-42.671 15.121,-40.579 v1(15.15,-40.55) ; C18.1@14.929,-70.478 v1(15.942,-70.478) ; v1@15.179,-40.521 15.179,-40.151 15.96,-39.37 TR2.3@16.06,-39.37 ; v1(22.8,-77.325) C21.1@23.813,-77.325 ; v1(22.925,-2.4) 22.966,-2.4 23.391,-1.975 26.564,-1.975 26.764,-1.775 R26.1@26.764,-1.65 ; C16.1@23,-63.838 v1(23,-62.575) ; v1(23.2,-75.25) C12.2@24.262,-75.25 ; v1(24.05,-62.575) 24.079,-62.604 25.186,-62.604 C15.1@25.375,-62.793 ; C27.1@25.025,-68.437 25.05,-68.462 v1(25.05,-69.275) 25.05,-70.038 C26.1@25.075,-70.063 ; v1(26.125,-52.825) 26.154,-52.854 26.154,-53.941 C19.1@26.238,-54.025 ; v1(26.2,-65.85) 26.241,-65.85 26.371,-65.98 U1.51@27.755,-65.98 ; v1(26.4,-70.8) 26.441,-70.8 26.621,-70.98 U1.61@27.755,-70.98 ; v1@26.446,-59.154 v1(26.475,-59.125) 26.501,-59.125 26.856,-59.48 U1.38@27.755,-59.48 ; C32.1@27.762,-57.575 v1(28.395,-57.575) ; C48.1@27.895,-25.216 28,-25.321 v1(28,-26.2) ; v1(29.7,-26.25) 29.7,-25.306 C47.1@29.79,-25.216 ; C40.1@29.9,-39.717 29.915,-39.733 v1(29.915,-40.7) ; v1(30.825,-52.562) 30.825,-53.674 C31.1@30.85,-53.699 ; C8.1@31.3,-48.288 31.425,-48.288 31.959,-47.754 32.471,-47.754 v1(32.5,-47.725) 33.625,-47.725 X1.2@33.8,-47.55 ; v1(31.83,-32.15) R20.1@33.143,-32.15 ; v1(31.9,-40.41) 31.9,-39.487 32,-39.387 C41.1@31.9,-39.287 ; v1(32,-35.6) C39.1@33.943,-35.6 ; v1(32.128,-58.61) 32.13,-58.608 U1.31@32.13,-57.105 ; v1(32.15,-80.3) 33.058,-80.3 C25.1@33.083,-80.275 ; U1.83@34.63,-78.355 v1(34.63,-77) ; X1.4@36.34,-53.75 36.35,-53.74 v1(36.35,-52.25) ; C22.1@37.308,-80.225 37.383,-80.15 v1(38.44,-80.15) 39.683,-80.15 C24.1@39.758,-80.225 39.758,-80.1 40.13,-79.728 U1.94@40.13,-78.355 ; C7.1@39.037,-47.613 39.056,-47.594 40.181,-47.594 v1(40.2,-47.575) ; U1.16@39.63,-57.105 39.63,-58.304 v1(40.034,-58.709) ; C30.1@40.42,-53.113 40.454,-53.079 41.471,-53.079 v1(41.5,-53.05) ; C46.1@44.532,-33.305 44.681,-33.454 44.681,-34.221 v1(44.71,-34.25) ; C29.1@44.587,-80.225 44.612,-80.25 v1(45.565,-80.25) ; C33.1@44.65,-52.983 44.662,-52.995 v1(45.555,-52.995) 45.579,-52.971 46.461,-52.971 C36.1@46.485,-52.948 ; U1.107@46.63,-78.355 v2(46.63,-76.85) ; U7.2@46.95,-27 v1(48.2,-27) ; v1(47.455,-70.745) 47.69,-70.98 U1.120@49.005,-70.98 ; R25.2@47.46,-38.488 47.5,-38.528 v1(47.5,-39.3) ; C11.2@47.988,-80.275 48.012,-80.3 v1(49.275,-80.3) ; U1.130@49.005,-65.98 v1(50.389,-65.98) v1@50.434,-66.025 ; R24.1@50.075,-6.7 R24.1@50.09,-6.685 ; C23.1@50.187,-78.355 v1(51.375,-78.355) ; C43.1@50.887,-32.445 50.99,-32.343 v1(51.875,-32.343) ; C45.1@51.032,-34 C45.1@50.932,-34.1 50.957,-34.125 v1(51.875,-34.125) ; C38.1@51.137,-28.895 50.937,-28.695 C38.1@50.937,-28.57 50.942,-28.575 v1(51.875,-28.575) ; C35.1@52.317,-61.31 52.317,-61.185 51.749,-60.616 51.749,-60.144 v1(51.72,-60.115) 51.749,-60.086 51.749,-59.703 52.35,-59.102 C28.1@52.35,-58.977 ; C34.1@52.692,-69.88 v1(53.69,-69.88) ; C37.1@52.962,-65.375 v1(54.025,-65.375) ; R4.1@53.917,-55 54.117,-55.2 54.117,-55.782 54.295,-55.959 v1(54.295,-56) ; v1(58.72,-48.94) v1@58.744,-48.964 ; D17.1@58.744,-49.776 D17.1@58.767,-49.8 ; D11.1@58.767,-63.3 D11.1@58.781,-63.286 ; v1@58.781,-62.354 v1(58.795,-62.34) ; C13.1@60.187,-9 C13.1@60.212,-9.025 ; D12.1@62.267,-63.3 D12.1@62.269,-63.299 ; v1(62.27,-62.41) v1(62.27,-62.41) ; v1(64.295,-80.105) 64.295,-79.01 C56.1@64.317,-78.987 ; v1(66.44,-30.815) 66.445,-30.81 67.695,-30.81 U11.19@67.7,-30.805 ; v1(67.24,-14.84) U14.14@68.7,-14.84 ; v1(67.275,-12.85) 67.295,-12.87 68.68,-12.87 U14.11@68.7,-12.89 ; U11.14@67.7,-27.555 67.712,-27.566 68.991,-27.566 v1(69.003,-27.578) ; U11.11@67.7,-25.605 67.721,-25.626 68.987,-25.626 v1(69.008,-25.647) ; U14.19@68.7,-18.09 68.705,-18.095 69.85,-18.095 v1(69.855,-18.1) ; C51.1@69.167,-33.195 69.182,-33.21 v1(70.27,-33.21) ; v1(69.79,-66.57) v1@69.804,-66.556 ; D9.1@69.804,-65.514 D9.1@69.817,-65.5 ; D3.1@69.817,-80.5 D3.1@69.829,-80.511 ; v1@69.829,-81.494 v1(69.84,-81.505) ; C60.1@70.057,-20.49 70.955,-20.49 v1(70.96,-20.485) ; v1(71.8,-66.245) v1@71.809,-66.236 ; D10.2@71.809,-65.009 D10.2@71.817,-65 ; D4.2@71.817,-80 D4.2@71.826,-80.009 ; C76.1@75.195,-77.947 75.209,-77.961 76.156,-77.961 v1(76.17,-77.975) ; v1(75.245,-80.51) 75.245,-80.551 75.404,-80.71 75.404,-81.562 C79.1@75.477,-81.635 ; C78.1@75.355,-63.412 75.862,-62.905 v1(76.285,-62.905) ; C77.1@75.575,-50.062 75.589,-50.076 76.751,-50.076 v1(76.765,-50.09) ; v1(75.895,-68.015) 76.918,-68.015 C74.1@76.97,-67.963 ; v1(75.935,-52.92) 75.959,-52.944 77.031,-52.944 C73.1@77.055,-52.968 ; C72.1@77.345,-39.363 77.359,-39.349 78.501,-39.349 v1(78.515,-39.335) ; C75.1@78.552,-79.57 78.561,-79.561 78.561,-78.524 v1(78.57,-78.515) ; R55.1@82.5,-44.687 82.545,-44.732 v1(82.545,-45.69) ; v1(93.96,-49.07) D14.1@95.145,-49.07 ; v1(94.07,-81.34) 94.845,-81.34 D2.1@94.995,-81.19 ; v1(95.045,-65.88) 95.045,-65.005 D8.1@95.31,-64.74